# EAGLE board STM32 control board (EAGLE 9.6.1)
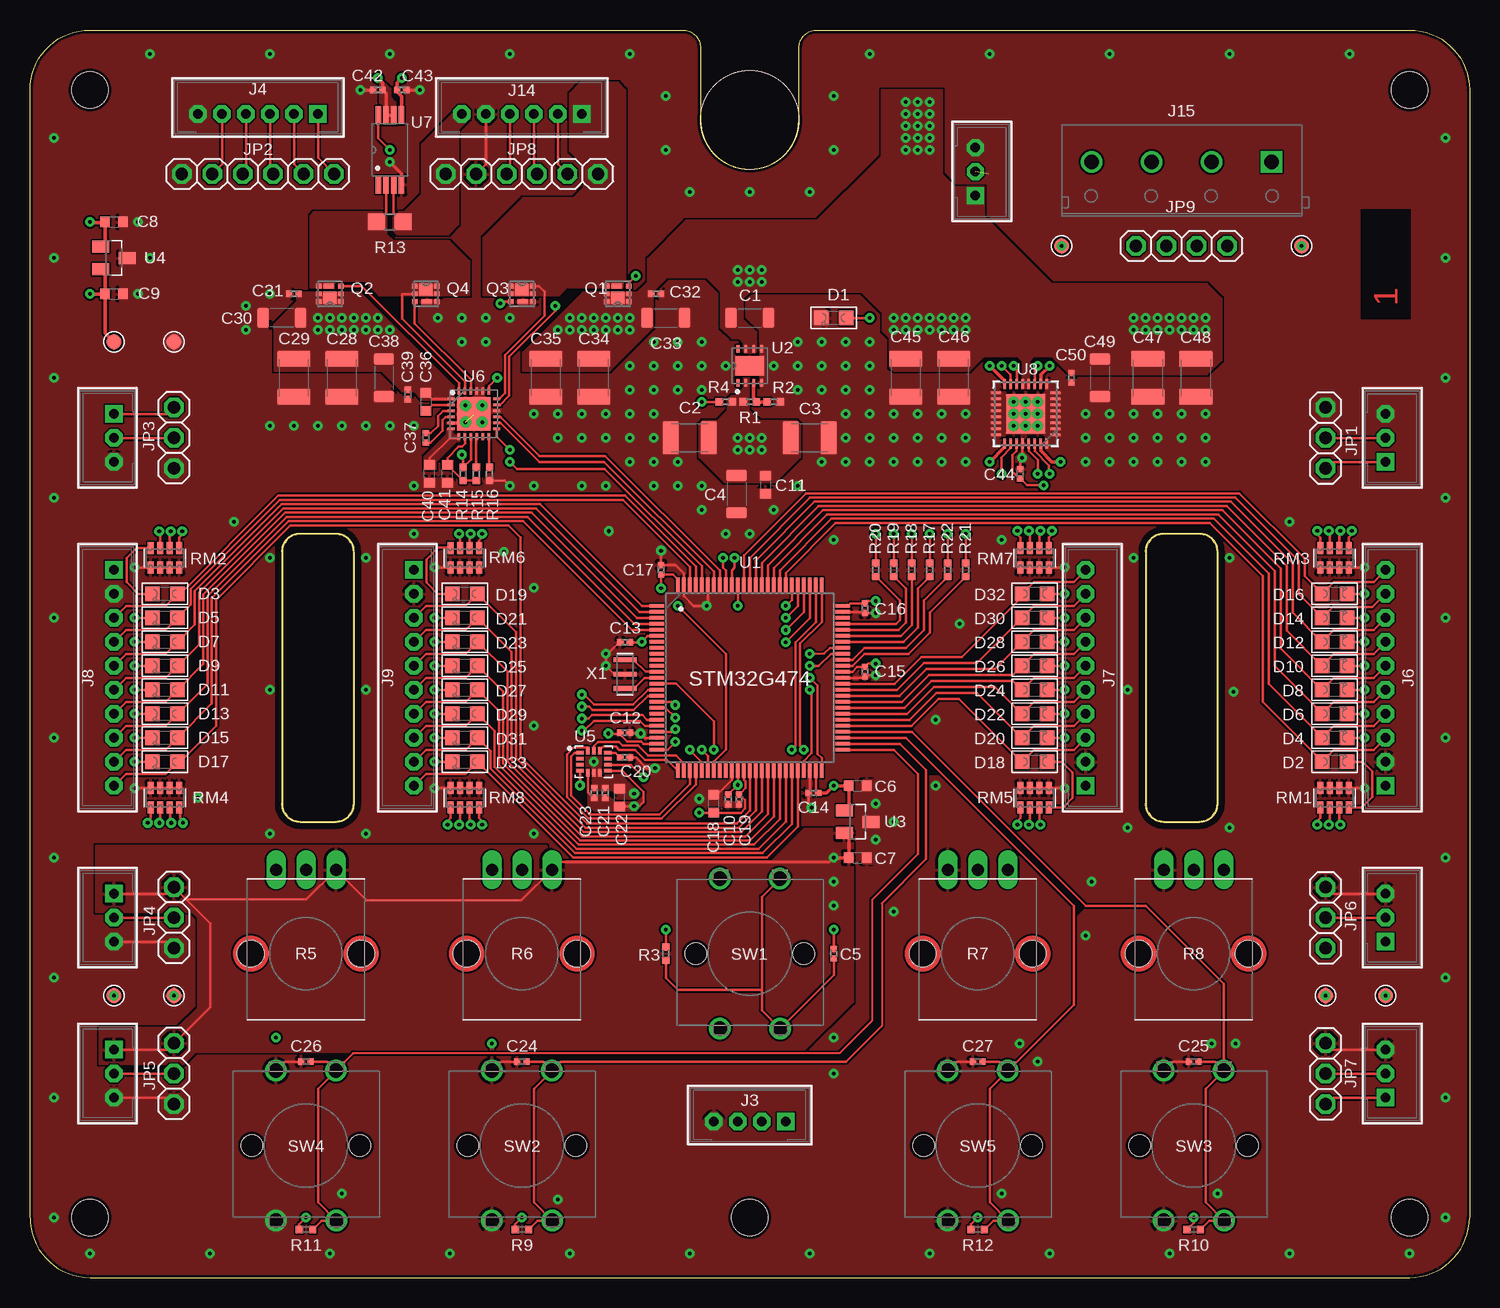
[diagram p0: board, top side]
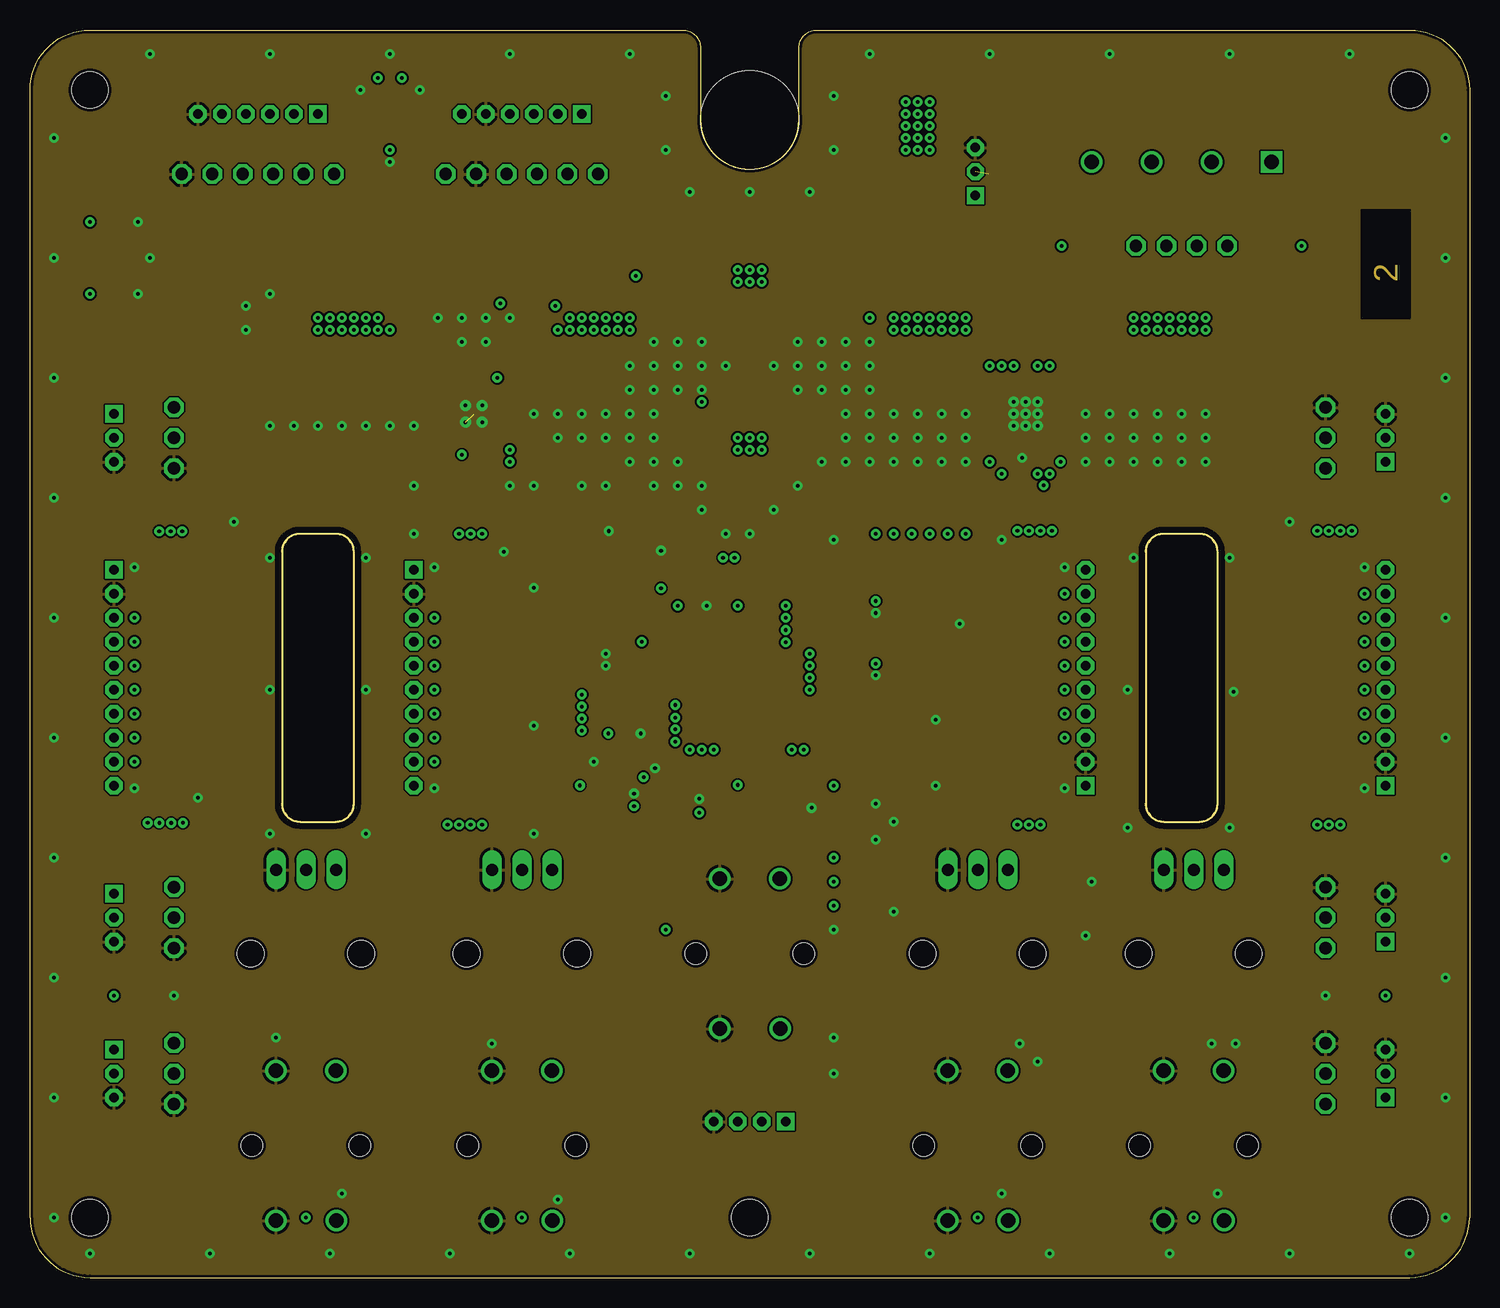
[diagram p1: board, inner layer Route2]
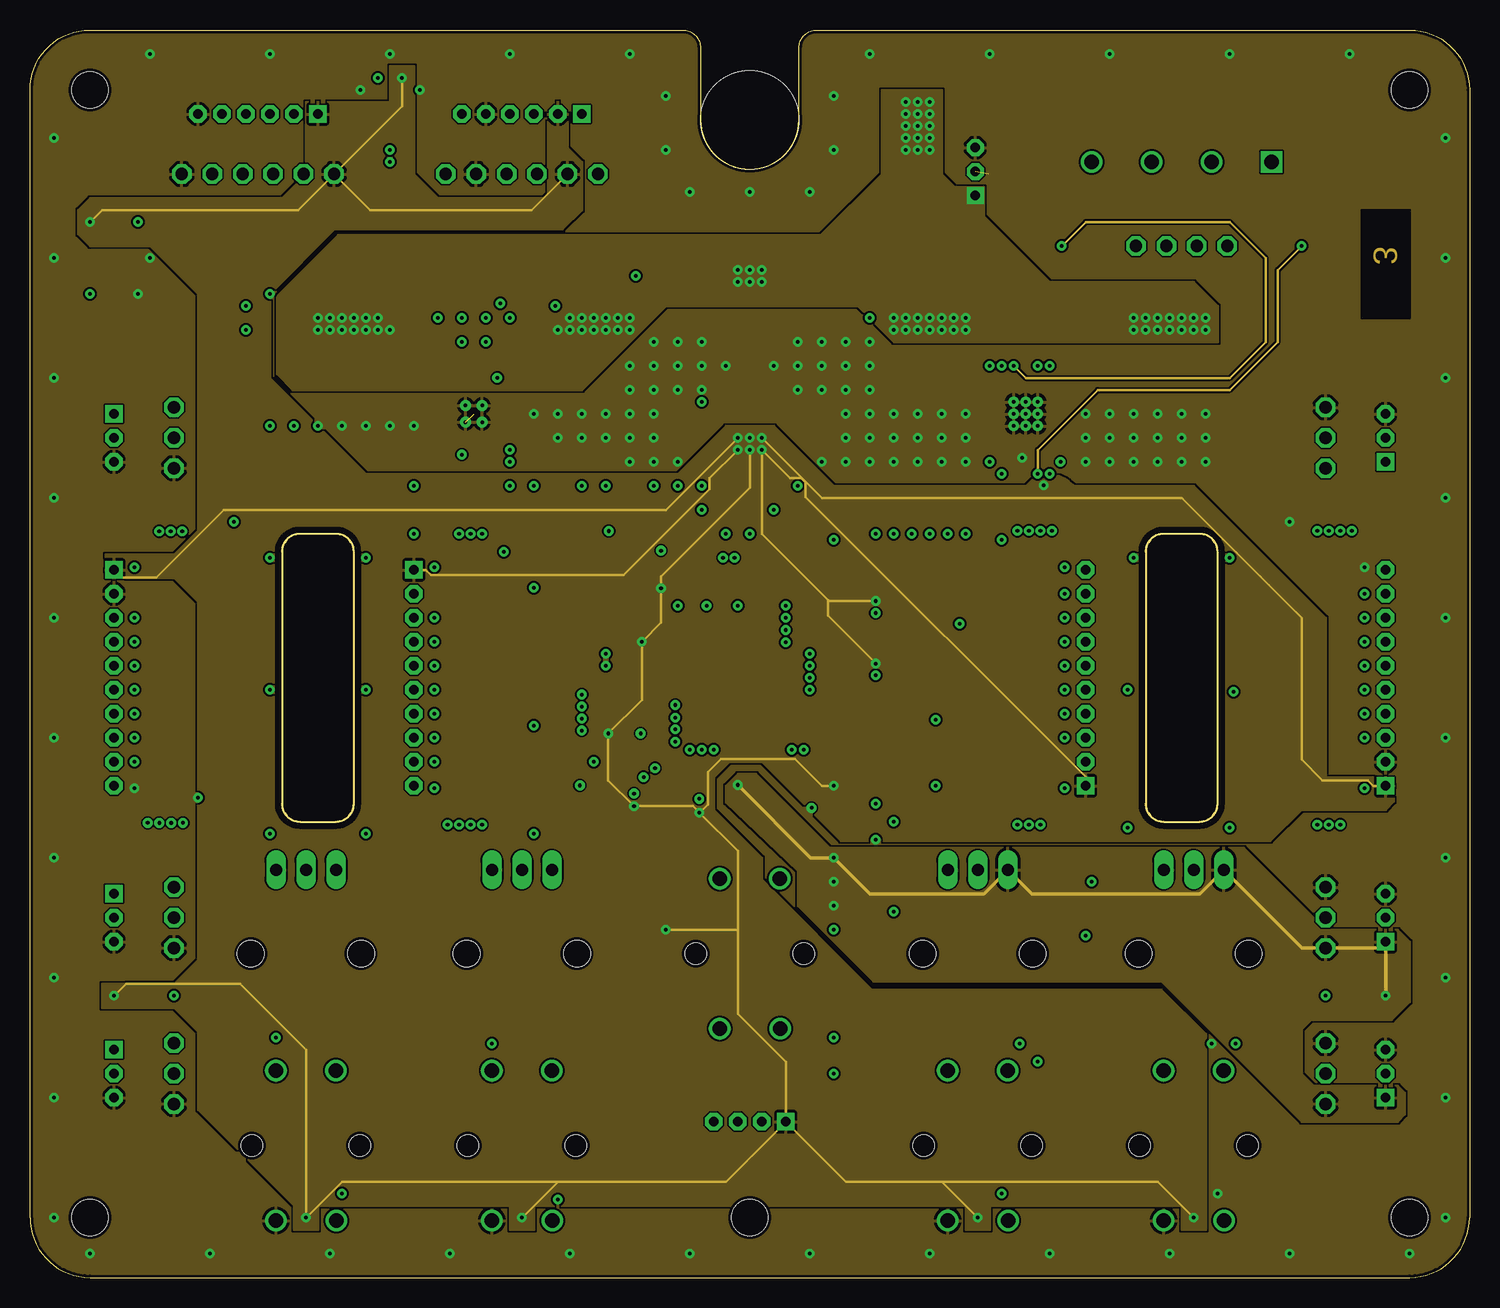
[diagram p2: board, inner layer Route15]
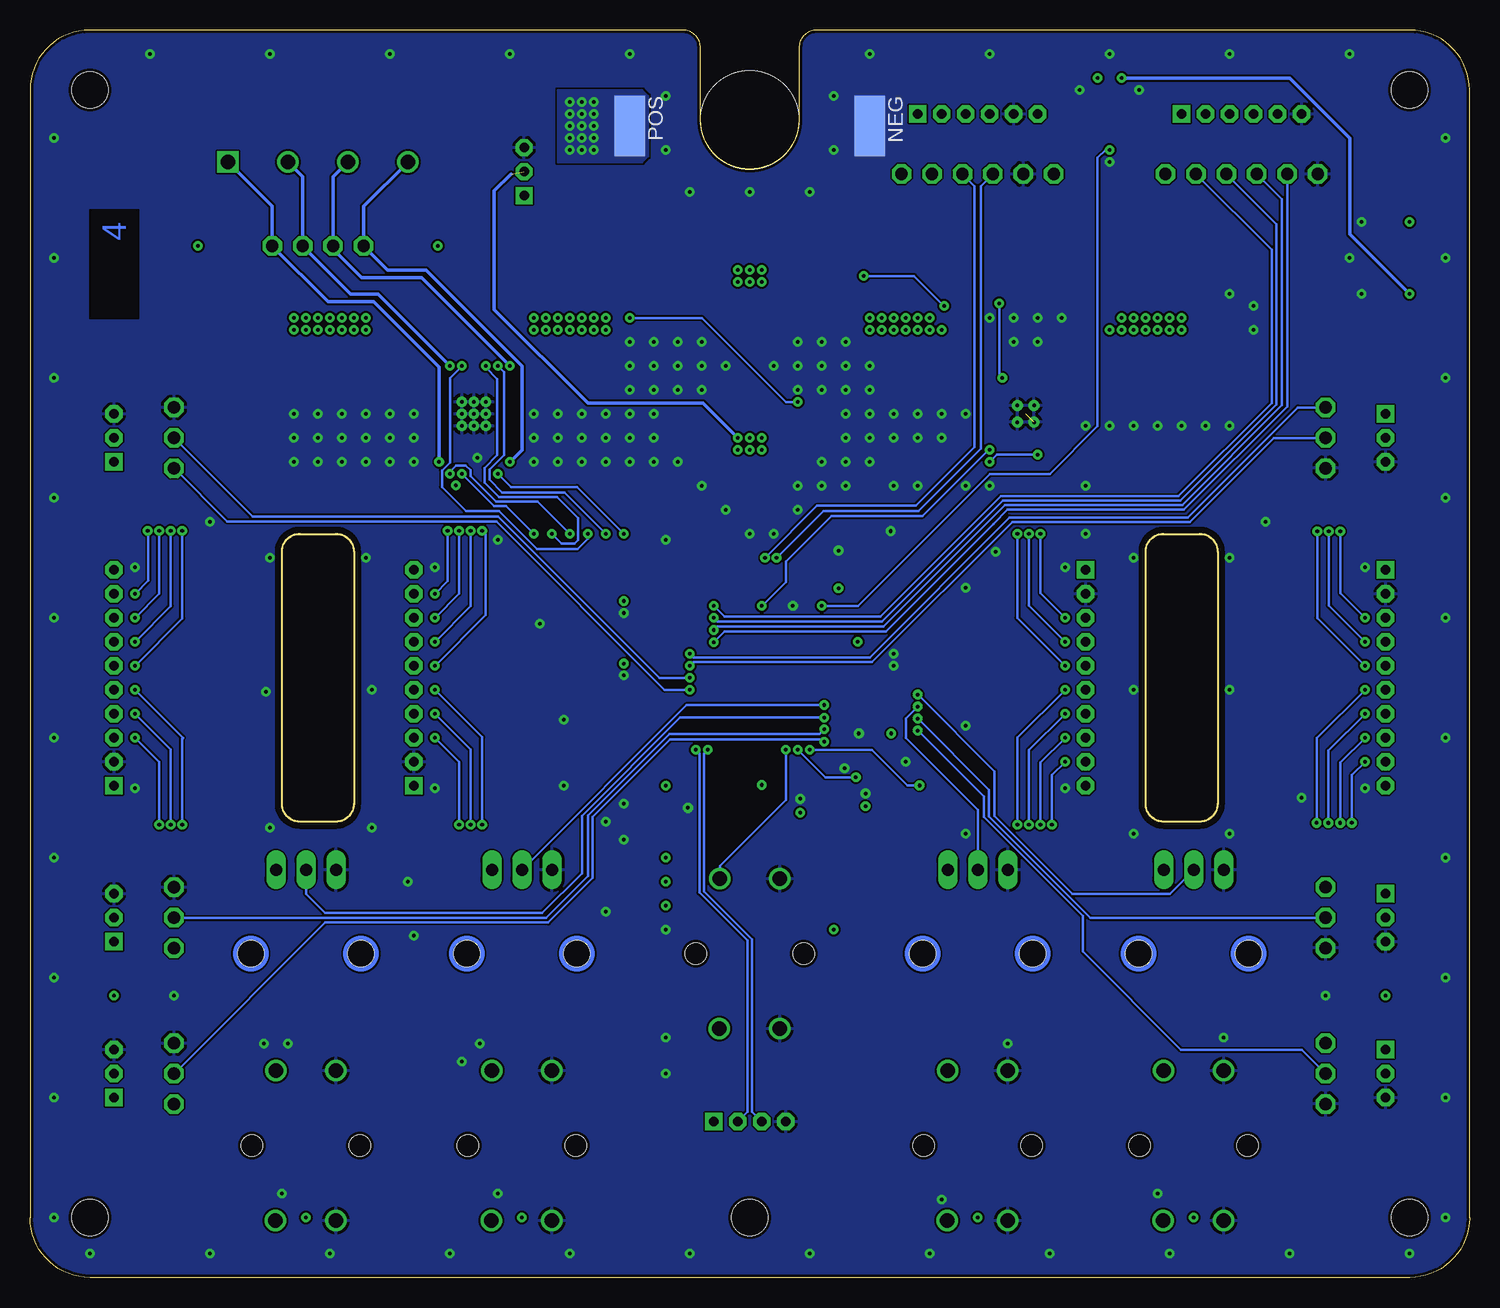
[diagram p3: board, bottom side, seen from below]

Size 120 x 104 mm. Coordinates in mm from the lower left corner, seen from the top.
Outline: 0,5 0,99 arc-90 5,104 54.4,104 arc-90 55.9,102.5 55.9,96.5 arc90 60,92.4 arc90 64.1,96.5 64.1,102.5 arc-90 65.6,104 115,104 arc-90 120,99 120,5 arc-90 115,0 5,0 arc-90 0,5
Copper layers (1+2*15+16): Top 0.035mm / dielectric 0.11mm / Route2 0.035mm / dielectric 1.13mm / Route15 0.035mm / dielectric 0.11mm / Bottom 0.035mm
Design rules "Pcb_Way_design_rules": minimum track width 6mil, minimum drill 0.3mm, track to track 6mil, track to pad 6mil, pad to pad 6mil, via to via 6mil, smd to smd 6mil, copper to edge 10mil, drill to drill 8mil, minimum pad ring 12mil, minimum via ring 10mil, stop-mask expansion 4mil, vias tented up to drill 25mil, thermal gap 10mil
Net classes: 3 POWER: clearance 0.2 mm
Holes 3 mm at 115,99 115,5 5,5 5,99 60,5
Holes 8.2 mm at 60,96.5
Milling: 16 lines

## Footprints (pad centres in the part's own frame; a part is rotated, then mirrored left to right if it is on the bottom)
TP1.27MM_MASK_SILKSCREEN = smd 1.27 x 1.27: 1 0,0
C1206 = smd 0.95 x 1.7: 1 -1.55,0; 2 1.55,0
C1210 = smd 1.35 x 2.8: 1 -1.6,0; 2 1.6,0
C0402 = smd 0.52 x 0.52: 1 -0.4,0; 2 0.4,0
C0603 = smd 0.8 x 0.9: 1 -0.75,0; 2 0.75,0
LED-0805 = smd 1.2 x 1.2: + -1.05,0; - 1.05,0
B3B-PH-K = drill 0.813 square: 1 -2,0 | drill 0.813 octagon: 2 0,0; 3 2,0
B4B-PH-K = drill 0.813 square: 1 -3,0 | drill 0.813 octagon: 2 -1,0; 3 1,0; 4 3,0
B6B-PH-K = drill 0.813 square: 1 -5,0 | drill 0.813 octagon: 2 -3,0; 3 -1,0; 4 1,0; 5 3,0; 6 5,0
B10B-PH-K = drill 0.813 square: 1 -9,0 | drill 0.813 octagon: 2 -7,0; 3 -5,0; 4 -3,0; 5 -1,0; 6 1,0; 7 3,0; 8 5,0; 9 7,0; 10 9,0
DG301-4P = drill 1.2 square: 1 -7.5,0 | drill 1.2: 2 -2.5,0; 3 2.5,0; 4 7.5,0
1X03 = drill 1.016 octagon: 1 -2.54,0; 2 0,0; 3 2.54,0
1X06 = drill 1.016 octagon: 1 -6.35,0; 2 -3.81,0; 3 -1.27,0; 4 1.27,0; 5 3.81,0; 6 6.35,0
1X04 = drill 1.016 octagon: 1 -3.81,0; 2 -1.27,0; 3 1.27,0; 4 3.81,0
SMD_PAD = smd 2.54 x 5.08: 1 0,0
SON2X2 = smd 0.455 x 0.4: D1 -0.922,0.65; D2 -0.922,0; D5 0.922,0; D6 0.922,0.65; G3 -0.922,-0.65; S4 0.922,-0.65 | smd 1.1 x 1.05: D7 0,0.325 | smd 0.85 x 0.4: S8 0.09,-0.65
R0402 = smd 0.6 x 0.6: 1 -0.55,0; 2 0.55,0
ALPS_PTM_LONG = drill 1 long: P$1 -2.5,0; P$2 0,0; P$3 2.5,0 | hole 2.2: -4.6,7; 4.6,7
CS_R0805 = smd 1.4 x 1.4: 1 -1.1,0; 2 1.1,0
0603-ARC = smd 0.5 x 1: 1 -1.2,-0.802; 2 -0.4,-0.802; 3 0.4,-0.802; 4 1.2,-0.802; 5 1.2,0.802; 6 0.4,0.802; 7 -0.4,0.802; 8 -1.2,0.802
SWITCH_B3F-4055 = drill 1.2 pad 1.753: 1 6.25,-2.5; 2 -6.25,-2.54; 3 6.25,2.5; 4 -6.25,2.5 | hole 1.8: 0,4.5; 0,-4.5
LPQFP-100 = smd 1.194 x 0.305: 1 -7.75,6; 2 -7.75,5.5; 3 -7.75,5; 4 -7.75,4.5; 5 -7.75,4; 6 -7.75,3.5; 7 -7.75,3; 8 -7.75,2.5; 9 -7.75,2; 10 -7.75,1.5; 11 -7.75,1; 12 -7.75,0.5; 13 -7.75,0; 14 -7.75,-0.5; 15 -7.75,-1; 16 -7.75,-1.5; 17 -7.75,-2; 18 -7.75,-2.5; 19 -7.75,-3; 20 -7.75,-3.5; 21 -7.75,-4; 22 -7.75,-4.5; 23 -7.75,-5; 24 -7.75,-5.5; 25 -7.75,-6; 51 7.75,-6; 52 7.75,-5.5; 53 7.75,-5; 54 7.75,-4.5; 55 7.75,-4; 56 7.75,-3.5; 57 7.75,-3; 58 7.75,-2.5; 59 7.75,-2; 60 7.75,-1.5; 61 7.75,-1; 62 7.75,-0.5; 63 7.75,0; 64 7.75,0.5; 65 7.75,1; 66 7.75,1.5; 67 7.75,2; 68 7.75,2.5; 69 7.75,3; 70 7.75,3.5; 71 7.75,4; 72 7.75,4.5; 73 7.75,5; 74 7.75,5.5; 75 7.75,6 | smd 0.305 x 1.194: 26 -6,-7.75; 27 -5.5,-7.75; 28 -5,-7.75; 29 -4.5,-7.75; 30 -4,-7.75; 31 -3.5,-7.75; 32 -3,-7.75; 33 -2.5,-7.75; 34 -2,-7.75; 35 -1.5,-7.75; 36 -1,-7.75; 37 -0.5,-7.75; 38 0,-7.75; 39 0.5,-7.75; 40 1,-7.75; 41 1.5,-7.75; 42 2,-7.75; 43 2.5,-7.75; 44 3,-7.75; 45 3.5,-7.75; 46 4,-7.75; 47 4.5,-7.75; 48 5,-7.75; 49 5.5,-7.75; 50 6,-7.75; 76 6,7.75; 77 5.5,7.75; 78 5,7.75; 79 4.5,7.75; 80 4,7.75; 81 3.5,7.75; 82 3,7.75; 83 2.5,7.75; 84 2,7.75; 85 1.5,7.75; 86 1,7.75; 87 0.5,7.75; 88 0,7.75; 89 -0.5,7.75; 90 -1,7.75; 91 -1.5,7.75; 92 -2,7.75; 93 -2.5,7.75; 94 -3,7.75; 95 -3.5,7.75; 96 -4,7.75; 97 -4.5,7.75; 98 -5,7.75; 99 -5.5,7.75; 100 -6,7.75
DRB0008B = smd 0.61 x 0.305: 1 -1.4,0.975; 2 -1.4,0.325; 3 -1.4,-0.325; 4 -1.4,-0.975; 5 1.4,-0.975; 6 1.4,-0.325; 7 1.4,0.325; 8 1.4,0.975 | smd 1.651 x 2.388: 9 0,0
SOT-23-3 = smd 1 x 1.4: 1 0,1.1; 2 0.95,-1.1; 3 -0.95,-1.1
14_PIN_LGA = smd 0.61 x 0.3: 1 -1.16,0.75; 2 -1.16,0.25; 3 -1.16,-0.25; 4 -1.16,-0.75; 8 1.16,-0.75; 9 1.16,-0.25; 10 1.16,0.25; 11 1.16,0.75 | smd 0.3 x 0.61: 5 -0.5,-0.91; 6 0,-0.91; 7 0.5,-0.91; 12 0.5,0.91; 13 0,0.91; 14 -0.5,0.91
VQFN-24-VIA = smd 0.61 x 0.229: 1 -1.9,1.25; 2 -1.9,0.75; 3 -1.9,0.25; 4 -1.9,-0.25; 5 -1.9,-0.75; 6 -1.9,-1.25; 13 1.9,-1.25; 14 1.9,-0.75; 15 1.9,-0.25; 16 1.9,0.25; 17 1.9,0.75; 18 1.9,1.25 | smd 0.229 x 0.61: 7 -1.25,-1.9; 8 -0.75,-1.9; 9 -0.25,-1.9; 10 0.25,-1.9; 11 0.75,-1.9; 12 1.25,-1.9; 19 1.25,1.9; 20 0.75,1.9; 21 0.25,1.9; 22 -0.25,1.9; 23 -0.75,1.9; 24 -1.25,1.9 | smd 2.794 x 2.794: 25 0,0 | drill 0.3: 26 -0.7,0.7; 27 -0.7,-0.7; 28 0.7,-0.7; 29 0.7,0.7
TSSOP-8 = smd 1.499 x 0.457: 1 -2.9,0.975; 2 -2.9,0.325; 3 -2.9,-0.325; 4 -2.9,-0.975; 5 2.9,-0.975; 6 2.9,-0.325; 7 2.9,0.325; 8 2.9,0.975
QFN_293Q_STM = smd 0.808 x 0.225: 1 -2.474,1.75; 2 -2.474,1.25; 3 -2.474,0.75; 4 -2.474,0.25; 5 -2.474,-0.25; 6 -2.474,-0.75; 7 -2.474,-1.25; 8 -2.474,-1.75; 17 2.474,-1.75; 18 2.474,-1.25; 19 2.474,-0.75; 20 2.474,-0.25; 21 2.474,0.25; 22 2.474,0.75; 23 2.474,1.25; 24 2.474,1.75 | smd 0.225 x 0.808: 9 -1.75,-2.474; 10 -1.25,-2.474; 11 -0.75,-2.474; 12 -0.25,-2.474; 13 0.25,-2.474; 14 0.75,-2.474; 15 1.25,-2.474; 16 1.75,-2.474; 25 1.75,2.474; 26 1.25,2.474; 27 0.75,2.474; 28 0.25,2.474; 29 -0.25,2.474; 30 -0.75,2.474; 31 -1.25,2.474; 32 -1.75,2.474 | drill 0.3: P$1 -1,1; P$2 0,1; P$3 1,1; P$4 -1,0; P$5 0,0; P$6 1,0; P$7 -1,-1; P$8 0,-1; P$9 1,-1 | smd 3.3 x 3.3: PAD 0,0
MURATA_SMD_3P = smd 0.4 x 1.9: 1 -1.2,0; 2 0,0; 3 1.2,0

## Placement (x,y rotation side)
$1_148_$_2020-08-01_13-42-32  [TP1.27MM_MASK_SILKSCREEN]  108,23.5 0 top
C1  10uF  [C1206]  60,80 0 top
C2  22uF  [C1210]  55,70 180 top
C3  22uF  [C1210]  65,70 0 top
C4  10uF  [C1206]  58.9,65.3 270 top
C5  100nF  [C0402]  67,27 90 top
C6  4.7uF  [C0603]  69,41 0 top
C7  4.7uF  [C0603]  69,35 0 top
C8  4.7uF  [C0603]  7,88 0 top
C9  4.7uF  [C0603]  7,82 0 top
C10  100nF  [C0402]  58.2,39.85 270 top
C11  4.7uF  [C0603]  61.3,66.1 270 top
C12  100nF  [C0402]  49.6,45.42 0 top
C13  100nF  [C0402]  49.6,52.95 180 top
C14  100nF  [C0402]  65.3,40.4 180 top
C15  100nF  [C0402]  69.6,50.5 270 top
C16  100nF  [C0402]  69.6,55.8 270 top
C17  100nF  [C0402]  52.6,59 90 top
C18  1uF  [C0603]  57,39.5 90 top
C19  100nF  [C0402]  59.1,39.85 270 top
C20  100nF  [C0402]  49.6,43.36 0 top
C21  100nF  [C0402]  47.95,40.41 90 top
C22  4.7uF  [C0603]  49.15,40.01 90 top
C23  10nF  [C0402]  47.05,40.41 90 top
C24  100nF  [C0402]  41,18 180 top
C25  100nF  [C0402]  97,18 180 top
C26  100nF  [C0402]  23,18 180 top
C27  100nF  [C0402]  79,18 180 top
C28  22uF  [C1210]  26,75 270 top
C29  22uF  [C1210]  22,75 270 top
C30  10uF  [C1206]  21,80 180 top
C31  100nF  [C0402]  22,82 180 top
C32  100nF  [C0402]  52.2,82 0 top
C33  10uF  [C1206]  53,80 0 top
C34  22uF  [C1210]  47,75 270 top
C35  22uF  [C1210]  43,75 270 top
C36  1uF  [C0603]  33,73 270 top
C37  100nF  [C0402]  33,70 270 top
C38  10uF  [C1206]  29.5,75 270 top
C39  100nF  [C0402]  31.5,73.6 270 top
C40  1uF  [C0603]  33.3,67 90 top
C41  1uF  [C0603]  34.8,67 90 top
C42  100nF  [C0402]  29,99 180 top
C43  100nF  [C0402]  31,99 0 top
C44  100nF  [C0402]  82.55,67 90 top
C45  22uF  [C1210]  73,75 270 top
C46  22uF  [C1210]  77,75 270 top
C47  22uF  [C1210]  93.19,75 270 top
C48  22uF  [C1210]  97.19,75 270 top
C49  10uF  [C1206]  89.19,75 270 top
C50  100nF  [C0402]  86.81,75 270 top
D1  Green  [LED-0805]  67,80 180 top
D2  Blue  [LED-0805]  108.75,43 0 top
D3  Blue  [LED-0805]  11.25,57 180 top
D4  Blue  [LED-0805]  108.75,45 0 top
D5  Blue  [LED-0805]  11.25,55 180 top
D6  Blue  [LED-0805]  108.75,47 0 top
D7  Blue  [LED-0805]  11.25,53 180 top
D8  Blue  [LED-0805]  108.75,49 0 top
D9  Blue  [LED-0805]  11.25,51 180 top
D10  Blue  [LED-0805]  108.75,51 0 top
D11  Blue  [LED-0805]  11.25,49 180 top
D12  Blue  [LED-0805]  108.75,53 0 top
D13  Blue  [LED-0805]  11.25,47 180 top
D14  Blue  [LED-0805]  108.75,55 0 top
D15  Blue  [LED-0805]  11.25,45 180 top
D16  Blue  [LED-0805]  108.75,57 0 top
D17  Blue  [LED-0805]  11.25,43 180 top
D18  Blue  [LED-0805]  83.75,43 0 top
D19  Blue  [LED-0805]  36.25,57 180 top
D20  Blue  [LED-0805]  83.75,45 0 top
D21  Blue  [LED-0805]  36.25,55 180 top
D22  Blue  [LED-0805]  83.75,47 0 top
D23  Blue  [LED-0805]  36.25,53 180 top
D24  Blue  [LED-0805]  83.75,49 0 top
D25  Blue  [LED-0805]  36.25,51 180 top
D26  Blue  [LED-0805]  83.75,51 0 top
D27  Blue  [LED-0805]  36.25,49 180 top
D28  Blue  [LED-0805]  83.75,53 0 top
D29  Blue  [LED-0805]  36.25,47 180 top
D30  Blue  [LED-0805]  83.75,55 0 top
D31  Blue  [LED-0805]  36.25,45 180 top
D32  Blue  [LED-0805]  83.75,57 0 top
D33  Blue  [LED-0805]  36.25,43 180 top
J1  B3B-PH  [B3B-PH-K]  78.8,92.2 90 top
J2  B3B-PH  [B3B-PH-K]  113,70 90 top
J3  B4B-PH  [B4B-PH-K]  60,13 180 top
J4  B6B-PH  [B6B-PH-K]  19,97 180 top
J5  B3B-PH  [B3B-PH-K]  7,70 270 top
J6  B10B-PH  [B10B-PH-K]  113,50 90 top
J7  B10B-PH  [B10B-PH-K]  88,50 90 top
J8  B10B-PH  [B10B-PH-K]  7,50 270 top
J9  B10B-PH  [B10B-PH-K]  32,50 270 top
J10  B3B-PH  [B3B-PH-K]  7,30 270 top
J11  B3B-PH  [B3B-PH-K]  7,17 270 top
J12  B3B-PH  [B3B-PH-K]  113,30 90 top
J13  B3B-PH  [B3B-PH-K]  113,17 90 top
J14  B6B-PH  [B6B-PH-K]  41,97 180 top
J15  DG301-4P  [DG301-4P]  96,93 180 top
JP1  [1X03]  108,70 90 top
JP2  [1X06]  19,92 180 top
JP3  [1X03]  12,70 270 top
JP4  [1X03]  12,30 270 top
JP5  [1X03]  12,17 270 top
JP6  [1X03]  108,30 90 top
JP7  [1X03]  108,17 90 top
JP8  [1X06]  41,92 180 top
JP9  [1X04]  96,86 180 top
NEG  [SMD_PAD]  50,96 180 bottom
POS  [SMD_PAD]  70,96 180 bottom
Q1  [SON2X2]  49,82 180 top
Q2  [SON2X2]  25,82 180 top
Q3  [SON2X2]  41,82 0 top
Q4  [SON2X2]  33,82 0 top
R1  16k9  [R0402]  60,73 180 top
R2  10k  [R0402]  62,73 180 top
R3  10k  [R0402]  53,27 270 top
R4  10k  [R0402]  58,73 0 top
R5  10K  [ALPS_PTM_LONG]  23,34 180 top
R6  10K  [ALPS_PTM_LONG]  41,34 180 top
R7  10K  [ALPS_PTM_LONG]  79,34 180 top
R8  10K  [ALPS_PTM_LONG]  97,34 180 top
R9  10k  [R0402]  41,4 180 top
R10  10k  [R0402]  97,4 180 top
R11  10k  [R0402]  23,4 180 top
R12  10k  [R0402]  79,4 180 top
R13  10 mOhm  [CS_R0805]  30,88 0 top
R14  10k  [R0402]  36.1,67 270 top
R15  10k  [R0402]  37.2,67 270 top
R16  510k  [R0402]  38.3,67 90 top
R17  100  [R0402]  75,59 90 top
R18  100  [R0402]  73.5,59 90 top
R19  100  [R0402]  72,59 90 top
R20  100  [R0402]  70.5,59 90 top
R21  100  [R0402]  78,59 90 top
R22  100  [R0402]  76.5,59 90 top
RM1  RES_ARRAY0603  [0603-ARC]  108.75,40 180 top
RM2  RES_ARRAY0603  [0603-ARC]  11.25,60 0 top
RM3  RES_ARRAY0603  [0603-ARC]  108.75,60 0 top
RM4  RES_ARRAY0603  [0603-ARC]  11.25,40 180 top
RM5  RES_ARRAY0603  [0603-ARC]  83.75,40 180 top
RM6  RES_ARRAY0603  [0603-ARC]  36.25,60 0 top
RM7  RES_ARRAY0603  [0603-ARC]  83.75,60 0 top
RM8  RES_ARRAY0603  [0603-ARC]  36.25,40 180 top
SW1  B3F-4055  [SWITCH_B3F-4055]  60,27 90 top
SW2  B3F-4055  [SWITCH_B3F-4055]  41,11 90 top
SW3  B3F-4055  [SWITCH_B3F-4055]  97,11 90 top
SW4  B3F-4055  [SWITCH_B3F-4055]  23,11 90 top
SW5  B3F-4055  [SWITCH_B3F-4055]  79,11 90 top
TP1  1.8  [TP1.27MM_MASK_SILKSCREEN]  12,23.5 0 top
TP2  1.8  [TP1.27MM_MASK_SILKSCREEN]  7,23.5 0 top
TP3  1.8  [TP1.27MM_MASK_SILKSCREEN]  12,78 0 top
TP4  3.0  [TP1.27MM_MASK_SILKSCREEN]  113,23.5 0 top
TP5  1.8  [TP1.27MM_MASK_SILKSCREEN]  7,78 180 top
TP37  [TP1.27MM_MASK_SILKSCREEN]  106,86 0 top
TP38  [TP1.27MM_MASK_SILKSCREEN]  86,86 0 top
U1  STM32G474  [LPQFP-100]  60,50 0 top
U2  TPS7A19  [DRB0008B]  60,76 90 top
U3  REF3330  [SOT-23-3]  69,38 270 top
U4  REF3318  [SOT-23-3]  7,85 270 top
U5  ICM_20600  [14_PIN_LGA]  47,43 0 top
U6  DRV8701VIA  [VQFN-24-VIA]  37,72 0 top
U7  [TSSOP-8]  30,94 90 top
U8  L2293Q  [QFN_293Q_STM]  83,72 180 top
X1  CSTNE  [MURATA_SMD_3P]  49.6,50.3 90 top

## Library data of the parts
$1_148_$_2020-08-01_13-42-32 NEG POS TP1-TP5 TP37 TP38 = testing
C1 C4 C30 C33 C38 C49 = Capacitors; MANUFACTURER_PART_NUMBER: CL31B106KAHNNNE
C2 C3 C28 C29 C34 C35 C45-C48 = Capacitors; MANUFACTURER_PART_NUMBER: GRM32ER61C476ME15L
C5-C27 C31 C32 C36 C37 C39-C44 C50 = Capacitors
D1-D33 = Semiconductor_devices
J1-J14 = con-jst-ph
J15 = Terminal blocks
JP1-JP9 = commonly used connectors
Q1-Q4 = Transistors; MANUFACTURER_PART_NUMBER: CSD15571Q2
R1-R12 R14-R22 RM1-RM8 = Resistors
R13 = Resistors; MANUFACTURER_PART_NUMBER: ERJ6CWDR010V
SW1-SW5 = buttons and switches; BUILT_BY: EMA_Cory; COPYRIGHT: Copyright (C) 2018 Accelerated Designs. All rights reserved; MANUFACTURER_PART_NUMBER: B3F-4055; VENDOR: Omron
U1 = stmicroelectronics; BUILT_BY: EMA_Jessica; COPYRIGHT: Copyright (C) 2016 Accelerated Designs. All rights reserved; MANUFACTURER_PART_NUMBER: STM32G4_LPQFP100_T1; VENDOR: STMicroelectronics
U2 = LDOs; DATASHEET: https://www.ti.com/lit/ds/symlink/tps7a19.pdf?ts=1594646251403&ref_url=https%253A%252F%252Fwww.google.com%252F; MANUFACTURER_PART_NUMBER: TPS7A1901DRBT
U3 U4 = Voltage references
U5 = InvenSence
U6 = Transistors drivers
U7 = Current sensing; MANUFACTURER_PART_NUMBER: INA240
U8 = Transistors drivers; MANUFACTURER_PART_NUMBER: L2293Q
X1 = resonators and oscillators

## Nets
+1.8V: C9.1 C42.1 TP5.1 U4.2 U7.6 U7.7
+3V: C7.1 C10.1 J10.1 J11.1 J12.1 J13.1 JP4.1 JP5.1 JP6.1 JP7.1 R5.P$1 R6.P$1 R7.P$1 R8.P$1 TP4.1 U1.36 U3.2
+3V3: C2.1 C3.1 C4.1 C6.1 C8.1 C11.1 C12.1 C13.1 C14.1 C15.1 C16.1 C17.1 C18.1 C19.1 C21.1 C22.1 C23.1 C43.1 C44.1 J1.2 J3.1 J4.1 J6.1 J7.1 J8.1 J9.1 J14.2 JP2.1 JP8.2 R1.2 R3.1 R4.2 R9.2 R10.2 R11.2 R12.2 TP2.1 U1.6 U1.24 U1.37 U1.49 U1.64 U1.75 U1.100 U2.2 U3.3 U4.3 U5.5 U5.8 U7.5 U8.27
AVDD1: C40.2 U6.6 U6.7
BRIDGE1_EN: R21.1 U1.65
BRIDGE2_EN: R22.1 U1.66
DRV2_SNSOUT: R15.1 U6.10
DVDD2: C41.2 R14.2 R15.2 U6.8
ENCODER_1: J14.3 JP8.3 U1.91
ENCODER_2: J14.4 JP8.4 U1.92
GND: $1_148_$_2020-08-01_13-42-32.1 C1.2 C2.2 C3.2 C4.2 C5.2 C6.2 C7.2 C8.2 C9.2 C10.2 C11.2 C12.2 C13.2 C14.2 C15.2 C16.2 C17.2 C18.2 C19.2 C20.2 C21.2 C22.2 C23.2 C24.2 C25.2 C26.2 C27.2 C28.2 C29.2 C30.2 C31.2 C32.2 C33.2 C34.2 C35.2 C38.2 C39.2 C40.1 C41.1 C42.2 C43.2 C44.2 C45.2 C46.2 C47.2 C48.2 C49.2 C50.2 D1.- J1.3 J2.3 J3.4 J4.6 J5.3 J6.2 J7.2 J8.2 J9.2 J10.3 J11.3 J12.3 J13.3 J14.5 JP1.3 JP2.6 JP3.3 JP4.3 JP5.3 JP6.3 JP7.3 JP8.5 NEG.1 Q3.S4 Q3.S8 Q4.S4 Q4.S8 R2.1 R5.P$3 R6.P$3 R7.P$3 R8.P$3 R16.1 RM1.1 RM1.2 RM1.3 RM1.4 RM2.1 RM2.2 RM2.3 RM2.4 RM3.1 RM3.2 RM3.3 RM3.4 RM4.1 RM4.2 RM4.3 RM4.4 RM5.1 RM5.2 RM5.3 RM5.4 RM6.1 RM6.2 RM6.3 RM6.4 RM7.1 RM7.2 RM7.3 RM7.4 RM8.1 RM8.2 RM8.3 RM8.4 SW1.3 SW1.4 SW2.3 SW2.4 SW3.3 SW3.4 SW4.3 SW4.4 SW5.3 SW5.4 TP1.1 TP3.1 U1.23 U1.35 U1.48 U1.63 U1.74 U1.95 U1.99 U2.4 U2.5 U2.9 U3.1 U4.1 U5.6 U5.7 U6.5 U6.16 U6.20 U6.21 U6.25 U6.26 U6.27 U6.28 U6.29 U7.4 U8.1 U8.2 U8.3 U8.4 U8.5 U8.6 U8.7 U8.8 U8.9 U8.17 U8.18 U8.19 U8.20 U8.21 U8.22 U8.23 U8.24 U8.28 U8.32 U8.P$1 U8.P$2 U8.P$3 U8.P$4 U8.P$5 U8.P$6 U8.P$7 U8.P$8 U8.P$9 U8.PAD X1.2
I2C3_SCL: J5.2 JP3.2 U1.67
I2C3_SDA: J5.1 JP3.1 U1.68
ICM_CS [ICM20600]: U1.26 U5.12
ICM_INT1 [ICM20600]: U1.30 U5.4
ICM_INT2 [ICM20600]: U1.31 U5.9
ICM_MISO [ICM20600]: U1.28 U5.1
ICM_MOSI [ICM20600]: U1.29 U5.14
ICM_SCK [ICM20600]: U1.27 U5.13
M2: J14.6 JP8.6 R13.2 U7.3
M_GH1: Q1.G3 U6.17
M_GH2: Q2.G3 U6.24
M_GL1: Q3.G3 U6.19
M_GL2: Q4.G3 U6.22
M_IN1: U1.93 U6.15
M_IN2: U1.94 U6.14
M_NFAULT: R14.1 U1.96 U6.9
M_NSLEEP: U1.90 U6.13
M_SH1: J14.1 JP8.1 Q1.S4 Q1.S8 Q3.D1 Q3.D2 Q3.D5 Q3.D6 Q3.D7 U6.18
M_SH2: Q2.S4 Q2.S8 Q4.D1 Q4.D2 Q4.D5 Q4.D6 Q4.D7 R13.1 U6.23 U7.2
MOTOR_CS: U1.32 U7.8
N$1: U1.12 X1.3
N$2: U1.13 X1.1
N$3: D16.- RM3.5
N$4: D14.- RM3.6
N$5: D12.- RM3.7
N$6: D10.- RM3.8
N$7: D1.+ R4.1
N$8: R17.2 U8.30
N$9: D2.- RM1.8
N$10: D4.- RM1.7
N$11: D6.- RM1.6
N$12: D8.- RM1.5
N$15: R18.2 U8.11
N$16: R19.2 U8.15
N$18: R20.2 U8.26
N$19: R21.2 TP37.1 U8.29
N$20: R22.2 TP38.1 U8.14
N$21: R1.1 R2.2 U2.3
N$23: D18.- RM5.8
N$24: C37.1 U6.3
N$25: D20.- RM5.7
N$26: D22.- RM5.6
N$27: D24.- RM5.5
N$28: D26.- RM7.8
N$29: D28.- RM7.7
N$30: D30.- RM7.6
N$31: D32.- RM7.5
N$32: C37.2 U6.4
N$33: C36.2 U6.2
N$34: D3.- RM2.8
N$35: D5.- RM2.7
N$36: D7.- RM2.6
N$37: R16.2 U6.12
N$38: D9.- RM2.5
N$39: D11.- RM4.8
N$40: D13.- RM4.7
N$41: D15.- RM4.6
N$42: D17.- RM4.5
N$43: D19.- RM6.8
N$44: D21.- RM6.7
N$45: D23.- RM6.6
N$46: D25.- RM6.5
N$47: D27.- RM8.8
N$48: D29.- RM8.7
N$49: D31.- RM8.6
N$50: D33.- RM8.5
PA0: J10.2 JP4.2 U1.20
PA1: J11.2 JP5.2 U1.21
PA2: J12.2 JP6.2 U1.22
PA3: J13.2 JP7.2 U1.25
PB12: C26.1 R11.1 SW4.1 SW4.2 U1.51
PB13: C24.1 R9.1 SW2.1 SW2.2 U1.52
PB14: C27.1 R12.1 SW5.1 SW5.2 U1.53
PB15: C25.1 R10.1 SW3.1 SW3.2 U1.54
PC0: R5.P$2 U1.15
PC1: R6.P$2 U1.16
PC2: R7.P$2 U1.17
PC3: R8.P$2 U1.18
PD0: D2.+ J6.3 U1.82
PD1: D4.+ J6.4 U1.83
PD2: D6.+ J6.5 U1.84
PD3: D8.+ J6.6 U1.85
PD4: D10.+ J6.7 U1.86
PD5: D12.+ J6.8 U1.87
PD6: D14.+ J6.9 U1.88
PD7: D16.+ J6.10 U1.89
PD8: D18.+ J7.3 U1.55
PD9: D20.+ J7.4 U1.56
PD10: D22.+ J7.5 U1.57
PD11: D24.+ J7.6 U1.58
PD12: D26.+ J7.7 U1.59
PD13: D28.+ J7.8 U1.60
PD14: D30.+ J7.9 U1.61
PD15: D32.+ J7.10 U1.62
PE0: D3.+ J8.3 U1.97
PE1: D5.+ J8.4 U1.98
PE2: D7.+ J8.5 U1.1
PE3: D9.+ J8.6 U1.2
PE4: D11.+ J8.7 U1.3
PE5: D13.+ J8.8 U1.4
PE6: D15.+ J8.9 U1.5
PE7: D17.+ J8.10 U1.38
PE8: D19.+ J9.3 U1.39
PE9: D21.+ J9.4 U1.40
PE10: D23.+ J9.5 U1.41
PE11: D25.+ J9.6 U1.42
PE12: D27.+ J9.7 U1.43
PE13: D29.+ J9.8 U1.44
PE14: D31.+ J9.9 U1.45
PE15: D33.+ J9.10 U1.46
PO1: J15.1 JP9.1 U8.31
PO2: J15.2 JP9.2 U8.10
PO3: J15.3 JP9.3 U8.16
PO4: J15.4 JP9.4 U8.25
POWER_OUT1: R17.1 U1.69
POWER_OUT2: R18.1 U1.70
POWER_OUT3: R19.1 U1.71
POWER_OUT4: R20.1 U1.72
REG: C20.1 U5.11
RST: C5.1 R3.2 SW1.1 SW1.2 U1.14
SPI3_MISO: J4.3 JP2.3 U1.80
SPI3_MOSI: J4.2 JP2.2 U1.81
SPI3_SCK: J4.4 JP2.4 U1.79
SPI_CS: J4.5 JP2.5 U1.78
SWCLK: J3.3 U1.77
SWDIO: J3.2 U1.76
USART3_RX: J2.2 JP1.2 U1.50
USART3_TX: J2.1 JP1.1 U1.47
VDD: C1.1 C28.1 C29.1 C30.1 C31.1 C32.1 C33.1 C34.1 C35.1 C36.1 C38.1 C39.1 C45.1 C46.1 C47.1 C48.1 C49.1 C50.1 J1.1 POS.1 Q1.D1 Q1.D2 Q1.D5 Q1.D6 Q1.D7 Q2.D1 Q2.D2 Q2.D5 Q2.D6 Q2.D7 U2.6 U2.7 U6.1 U8.12 U8.13

## Tracks (layer width: path | path; a pad name or v marks a point on that pad's centre or on a via)
+1.8V  (via drill 0.3)
  Top 0.3: v29,100 29.4,99.6 C42.1 29.68,98.72 U7.7 U7.6 | C9.1 6.25,78.75 TP5.1 | C9.1 v5,82 | U4.2 6.25,83.7 C9.1
  Bottom 0.3: v5,82 10,87 10,95 15,100 v29,100
  pour Top (no thermals): 30.45,96.2 30.45,98 30,98.45 30,99.1 29.2,99.9 29.2,97.95 29.55,97.6 29.55,96.2
+3V  (via drill 0.3)
  Top 0.2: JP4.1 11.46,32 J10.1 | J11.1 11.46,19 JP5.1 15,22.54 15,29.54 JP4.1 | JP7.1 108.54,15 J13.1 | C10.1 58.2,40.27 v59,41.07 U1.36 | v67,35 66.65,34.65 44.15,34.65 R6.P$1 40.95,31.45 28.05,31.45 R5.P$1 23.04,31.54 13,31.54 JP4.1
  Top 0.3: U3.2 68.25,36.7 C7.1 v67,35
  Route15 0.3: v59,41.07 65.07,35 v67,35 70,32 79.5,32 R7.P$1 83.5,32 97.5,32 R8.P$1 106.04,27.46 JP6.1 112.46,27.46 J12.1 TP4.1
  other vias: 113,23.5 67,31 67,33
  pour Top: 5.8,20.8 5.8,17.8 12.8,17.8 13.8,18.8 64.4,18.8 68.6,23 68.6,37.4 64.5,37.4 61.8,34.7 44.3,34.7 43,36 5.5,36 5.5,30.5 13.5,30.5 14,30 14,22.5 12.3,20.8
  pour Route15: 58,39.6 58,41 59,42 60.5,42 66.7,35.8 101.2,35.8 108,29 114,29 115,28 115,23 113.5,21.5 106.8,21.5 106,20.7 106,17 107,16 114,16 114.6,15.4 114.6,13.6 114,13 106,13 94.3,24.7 70.3,24.7 64,31 64,33.9
+3V3  (via drill 0.3)  (1 unrouted)
  Top 0.2: v48.2,45.36 48.24,45.32 49.02,45.32 C12.1 49.12,45.34 49.76,44.7 50.94,44.7 51.15,44.49 U1.24 | U1.75 68.2,56 68.4,56.2 C16.1 69.8,56.4 v70.5,56.4 | U1.64 68.55,50.49 68.96,50.9 C15.1 69.88,51.18 v70.5,51.18 | U1.49 65.5,40.6 C14.1 | v84.5,66.05 83.1,66.05 C44.1 82.26,66.89 82.19,66.89 81.91,67.17 81.91,68.56 82.25,68.9 U8.27 | J14.2 44,92.81 JP8.2 | R10.2 97,4.55 v97,5 | R12.2 78.45,4.45 v79,5 | R11.2 22.45,4.45 v23,5 | R9.2 40.45,4.45 v41,5 | v55.8,38.75 C18.1 59.28,38.75 59.61,39.09 59.61,39.81 59.18,40.25 C19.1 59.26,40.41 59.27,40.41 59.66,40.8 59.66,41.34 59.5,41.49 U1.37 | U5.5 46.54,42.05 46.54,40.44 46.98,39.99 47.04,39.99 C23.1 | R3.1 v53,29 | v52.6,57.45 C17.1 53.6,58.6 54,58.2 U1.100 | C13.1 50.95,52.95 v51,53 v51,53.01 51.49,53.5 U1.6 | C22.1 50.3,39.26 v50.35,39.3 50.8,39.3 51.16,39.66 51.16,40.47 49.38,42.25 U5.8 | JP2.1 24,93.35 J4.1
  Top 0.3: v5,88 5.05,87.95 6.2,87.95 C8.1 6.25,86.3 U4.3 | v31,100 30.6,99.6 C43.1 30.59,98.99 30.59,98.86 30.98,98.48 U7.5 | C14.1 66.4,40.4 v67,41 C6.1 68.25,39 68.2,38.95 U3.3
  Route15 0.2: v59,69 56.66,66.66 56.66,65.73 49.47,58.54 33.43,58.54 32.97,59 J9.1 | v59,70 53,64 16.14,64 10.5,58.36 7.64,58.36 J8.1 | J7.1 88,41.71 64.66,65.05 64.66,66.27 64.27,66.66 63.34,66.66 v61,69 61,62 66.5,56.5 | v61,70 66,65 96,65 106,55 106,43.2 107.74,41.46 111.52,41.46 111.98,41 J6.1 | v5,88 6,89 22.35,89 JP2.1 | JP8.2 41.81,89 28.35,89 JP2.1 | JP2.1 31,97.65 v31,100 | v97,5 94,8 76,8 | v79,5 76,8 | J3.1 68,8 76,8 | 44,8 26,8 v23,5 23,19 17.5,24.5 8,24.5 TP2.1 | v41,5 44,8 | J3.1 58,8 44,8 | J3.1 63,18 59,22 59,29 | 59,29 59,35.55 v55.8,38.75 | v55.8,38.75 56.5,39.45 56.5,42.15 57.6,43.25 63.75,43.25 66,41 v67,41 | v53,29 59,29 | v60,69 60,65.85 52.6,58.45 v52.6,57.45 52.6,54.6 v51,53 51,48.16 v48.2,45.36 48.2,41.45 v50.35,39.3 55.25,39.3 v55.8,38.75 | v70.5,56.4 66.6,56.4 66.5,56.5 | v70.5,51.18 66.5,55.18 66.5,56.5
  Bottom 0.3: v61,70 63.9,72.9 73.5,72.9 81.3,80.7 81.3,90.6 79.9,92
  other vias: 60,70 7,23.5
  pour Top (no thermals): 59.5,75 59.5,74.2 58.8,73.5 58.5,73.5 58.2,73.2 58.2,72.3 57.3,71.4 56.1,71.4 55.8,71.1 55.8,68.4 57.9,66.3 62.1,66.3 64.2,68.4 64.2,71.1 63.9,71.4 60.8,71.4 59.9,72.3 59.9,75
  pour Top (no thermals): 46.55,40.45 46.55,39.45 47.05,38.95 50.5,38.95 51.15,39.6 51.15,40.15 50.6,39.6 48.75,39.6 48.2,40.15 48.15,40.15 48.1,40.2 46.8,40.2
  pour Route15: 20,75 28,67 54,67 58,71 62,71 67,66 83,66 84,67 84.59,67 arc-45 87,66 97,66 108,55 108,41.7 113.7,41.7 113.7,39.7 113,39 106,39 103.4,36.4 67.6,36.4 61,43 58.3,43 57,41.7 57,39 61,35 61,33.2 70.2,24 94.3,24 98,20.3 98,4 96,4 96,6 80,6 80,4 78,4 78,6 42,6 42,4 40,4 40,6 24,6 24,4 22,4 22,6 14,14 14,20.5 12,22.5 6,22.5 6,24.5 12,24.5 14,26.5 14,56.3 12,58.3 6.3,58.3 6.3,60.26 12,60.26 14,62.26 14,82 10,86 5,86 4,87 4,89 5,90 21,90 23,92 23,98 30,98 30,101 32,101 32,92 34,90 43.2,90 43.2,98 44.3,98 44.8,97.5 44.8,94.2 46,93 46,89 44.4,87.4 25.4,87.4 20,82
AVDD1
  Top 0.2: U6.6 35,70.65 35,70 | 35,70 35.65,70 U6.7 | C40.2 33.3,68.3 35,70
  pour Top (no thermals): 32.9,67.4 32.9,68.45 34.75,70.3 34.75,70.75 35.2,70.75 35.2,70.45 35.45,70.2 35.75,70.2 35.75,69.75 35.55,69.75 33.8,68 33.8,67.4
BRIDGE1_EN
  Top 0.2: U1.65 68.56,51 69.56,52 73.24,52 75,53.76 75,55.45 R21.1
BRIDGE2_EN
  Top 0.2: U1.66 68.56,51.5 69.56,52.5 73.03,52.5 74.5,53.97 74.5,56.45 R22.1
DRV2_SNSOUT
  Top 0.2: U6.10 37.2,70.05 R15.1
DVDD2
  Top 0.2: R15.2 R14.2 C41.2 34.8,68.33 35.73,69.26 36,69.26 36.25,69.51 U6.8
ENCODER_1  (via drill 0.3)
  Top 0.2: U1.91 58.5,58.95 58.73,59.18 v58.73,60 | J14.3 42,92.27 JP8.3
  Bottom 0.2: JP8.3 41.27,91 41.27,69.23 46.16,64.34 54.39,64.34 v58.73,60
ENCODER_2  (via drill 0.3)
  Top 0.2: v57.77,60 57.77,59.18 58,58.95 U1.92 | J14.4 40,92.27 JP8.4
  Bottom 0.2: JP8.4 40.73,91 40.73,69.1 45.93,63.9 53.87,63.9 v57.77,60
GND  (via drill 0.3)  (1 unrouted)
  Top 0.2: C12.2 49.98,45.36 v50.9,45.36 51.26,45 U1.23 | U1.74 69.5,55.5 C16.2 v70.5,55.4 | U1.63 68.05,50 68.06,49.99 69.5,49.99 C15.2 69.72,50.22 v70.5,50.22 | U1.48 65,40.5 C14.2 64.9,39.4 v65.15,39.15 | R16.1 39.55,66.45 v40,66 | C44.2 82.55,68.17 v82.71,68.34 82.75,68.37 U8.28 | RM7.1 RM7.2 RM7.3 RM7.4 v86.25,59.2 | RM3.1 RM3.2 RM3.3 RM3.4 v111.25,59.2 | RM1.4 RM1.3 RM1.2 RM1.1 111.2,40.8 v111.25,40.8 | RM5.4 RM5.3 RM5.2 RM5.1 v86.25,40.8 | RM8.1 RM8.2 RM8.3 RM8.4 33.75,40.8 v33.7,40.8 | RM6.4 RM6.3 RM6.2 RM6.1 33.75,59.2 v33.7,59.2 | RM4.1 RM4.2 RM4.3 RM4.4 v8.7,40.8 | RM2.4 RM2.3 RM2.2 RM2.1 v8.7,59.2 | C20.2 50.5,43.36 51.41,42.45 v52.1,42.45 | JP8.5 38,92.81 J14.5 | JP4.3 11.46,28 J10.3 | JP5.3 11.46,15 J11.3 | JP7.3 108.54,19 J13.3 | JP6.3 108.54,32 J12.3 | U1.35 58.5,41.5 57.25,40.25 C18.2 | C5.2 v67,29 | C13.2 49.1,52.95 48.15,52 v48,52 v48,51 48.7,50.3 X1.2 | v52.6,60.6 C17.2 53.81,59.4 54.51,58.7 U1.99 54.5,56.8 55.3,56 v56.4,56 56.5,56.1 U1.95 | C26.2 21.25,18 SW4.3 | C24.2 39.25,18 SW2.3 | C27.2 77.25,18 SW5.3 | C25.2 95.25,18 SW3.3
  Top 0.3: U6.5 36.25,71.25 U6.27 | U7.4 30.98,92.03 v30,93 | C42.2 v27.55,99 | C43.2 v32.5,99
  other vias: 78,72 76,72 74,72 72,72 70,72 70,70 72,70 74,70 76,70 78,70 78,68 76,68 74,68 72,68 70,68 88,72 88,70 88,68 90,72 90,70 90,68 92,72 92,70 92,68 94,72 94,70 94,68 96,72 96,70 96,68 98,72 98,70 98,68 50,72 50,70 50,68 48,70 48,72 46,72 46,70 44,70 44,72 42,72 56,76 56,78 54,78 54,76 54,74 52,74 52,76 52,78 50,76 50,74 64,78 64,76 66,76 66,78 68,78 68,76 66,74 68,74 70,78 70,76 70,74 58,76 62,76 64,74 52,66 54,68 52,72 52,70 52,68 60,62 56,66 58,62 56,64 54,66 62,64 64,66 66,68 68,68 68,70 68,72 56,74 42,66 46,66 48,66 47,43 50.35,40.35 70.5,39.5 72,38 70.5,36.5 65,90.5 60,90.5 55,90.5 108,23.5 12,23.5 55.8,39.9 2,95 2,85 2,75 2,65 2,55 2,45 2,35 2,25 2,15 2,5 5,2 15,2 25,2 35,2 45,2 55,2 65,2 75,2 85,2 95,2 105,2 115,2 118,5 118,15 118,25 118,35 118,45 118,55 118,65 118,75 118,85 118,95 110,102 100,102 90,102 80,102 70,102 67,94 53,94 50,102 40,102 30,102 20,102 10,102 32,66 30,71 28,71 26,71 24,71 22,71 20,71 32,71 9,82 10,85 9,88 18,79 18,81 20,82 34,80 36,80 38,80 36,78 38,78 40,80 53,98.5 67,98.5 48.26,62.23 100.33,48.83 75.5,46.5 75.5,41 77.5,54.5 81,61.5 67,61.5 100,60 91.5,49 100,37.5 91.5,37.5 88,28.5 88.5,33 100.5,19.5 98.5,19.5 84,18 82.5,19.5 67,20 67,17 72,30.5 38.5,19.5 20.5,20 81,7 99,7 44,6.5 26,7 42,37 28,37 20,37 20,49 28,49 28,60 42,57.5 39.5,60.5 32,62 14,40 20,60 92,60 42,46 105,63 17,63
  pour Route2: 0,104 0,0 120,0 120,104
  pour Route2 (no thermals): 81,74 81,70 85,70 85,74
  pour Route2 (no thermals): 35,74 35,70 39,70 39,74
  cutout Route2: 92.5,60.5 92.5,39.5 arc90 94.5,37.5 97.5,37.5 arc90 99.5,39.5 99.5,60.5 arc90 97.5,62.5 94.5,62.5 arc90
  cutout Route2: 25.5,62.5 22.5,62.5 arc90 20.5,60.5 20.5,39.5 arc90 22.5,37.5 25.5,37.5 arc90 27.5,39.5 27.5,60.5 arc90
  pour Top (no thermals): 57,79.2 57,81.9 56.1,82.8 53.4,82.8 52.5,81.9 52.5,79 48.5,75 41.1,75 41.1,70.6 42.7,69 48.1,69 56.1,61 59.6,61 64.7,66.1 79,66.1 79.2,66.3 79.2,69.3 79.8,69.9 79.8,73.5 78.3,75 71.7,75 71.1,75.6 71.1,78 70.2,78.9 67.2,78.9 66.6,79.5 66.6,80.4 65.4,81.6 60.3,81.6 60,81.3 60,80.1 60.9,79.2 60.9,74.4 62.1,73.2 62.1,72.6 62.7,72 64.5,72 64.8,71.7 64.8,68.1 62.4,65.7 57.6,65.7 55.2,68.1 55.2,73.1 56,73.9 57.4,73.9 59.1,75.6 59.1,76.5 58.5,77.1 58.5,77.7
  cutout Route2: 111,89 111,80 115,80 115,89
  pour Top (no thermals): 32.7,81.45 32.7,79.7 37.2,75.2 37.2,73.5 36.9,73.2 38.1,73.2 37.8,73.5 37.8,75.9 42.1,80.2 42.1,81.45 40.8,81.45 40.8,81 40.2,80.4 38.8,80.4 38.4,80.8 38.4,81.45
  pour Top (no thermals): 78.3,75 79.8,75 81.3,73.5 84.3,73.5 84.7,73.9 84.7,74.8 113,74.8 114.3,73.5 114.3,71.4 114,71.1 106.8,71.1 102,66.3 88.2,66.3 87,67.5 87,68.4 86.4,69 84.9,69 84.7,69.2 84.7,70.1 84.45,70.35 81.15,70.35 79.8,69 78.9,69 78.3,69.6
  pour Top (no thermals): 38.1,72.6 38.3,72.4 39.4,72.4 41.1,74.1 41.4,74.1 41.4,70.3 39.6,72.1 38.2,72.1 38.1,72
  pour Top (no thermals): 38.1,66.9 47.7,66.9 49,65.6 49,65.4 6,65.4 6,68.7 12.9,68.7 14.4,70.2 14.4,74.1 7.5,81 7.5,90.8 12.3,95.6 12.3,98.4 15,98.4 15,93.9 13.8,92.7 13.8,91.2 16.2,88.8 22.2,88.8 22.5,88.5 22.5,83.4 21.7,82.6 21.7,81.7 19.8,79.8 19.8,75 29.1,75 30.7,73.4 31.7,73.4 32.1,73 32.1,71.4 32.4,71.1 32.4,67.2 33,66.6 35.1,66.6 35.7,66 37.8,66
  pour Top (no thermals): 46.6,43.35 46.6,42.7 46.95,42.35 46.95,40.65 48.55,40.65 49.15,40.05 50.5,40.05 50.5,40.5 49.35,41.65 47.75,41.65 47.55,41.85 47.55,43.35
  pour Top (no thermals): 69.5,34.5 70.5,34.5 73,37 73,39 70.5,41.5 69.5,41.5 69,41 69,38.2 66.9,38.2 65.1,40 65.1,41.6 65.05,41.65 64.95,41.65 64.75,41.45 64.75,38.25 65.2,37.8 69,37.8 69,35
  pour Bottom: 48.5,93.5 55,87 65,87 67,89 67,90.5 66.5,91 57,91 51.95,96.05 51.95,98.5 51.45,99 48.5,99
  pour Top (no thermals): 59.3,39.25 57.95,39.25 57.8,39.4 55.2,39.4 55.2,40.15 56.45,41.4 58.15,41.4 58.55,41.8 58.55,41.4 57.95,40.8 57.8,40.8 57.6,40.6 57.6,39.95 57.95,39.6 59.3,39.6
  pour Top (rank 2, no thermals): 15,98 16,99 25,99 26,98 35,98 35.5,98.5 36.2,98.5 37.4,97.3 37.4,96.7 37.75,96.35 38.3,96.35 38.65,96.7 38.65,97.3 39.85,98.5 42.5,98.5 45,101 50,101 51,100 51,89 53,87 64.5,87 70,92.5 70,100 77,100 77,94.5 78.2,93.3 85.3,93.3 88,96 104,96 109,91 109,83 108,82 108,76 106,74 109,74 110,73 113,73 114,72 114,71 115,70 115,45 113,43 115,41 115,34 113,32 115,30 115,21 113,19 115,17 115,12 106,3 96,3 95,4 94,4 93,3 78,3 77,4 74,4 69,9 59,9 58,10 58,13 57,14 56,13 56,10 55,9 51,9 45,3 40,3 39,4 38,4 37,3 22,3 21.5,3.5 21.5,6.71 13,15.3 8.1,15.3 7.6,15.8 5,15.8 5,27 10.6,27 11.2,26.4 12.5,26.4 13,26.9 13,27.9 12.5,28.4 11.7,28.4 11.1,29 5,29 5,56 7.5,56 8,56.5 8,57.5 7.5,58 5,58 5,64 7,66 7,68 5,70 5,80 4,81 4,89 5,90 9,90 13,94 13,104 0,104 0,0 120,0 120,104 14,104 14,98
  pour Top: 11,104 15,104 15,96 11,96
  cutout Top: 111,89 111,80 115,80 115,89
  pour Route15 (rank 2): 3,90 4,91 13,91 15,93 15,98 17,100 21,100 23,102 33,102 37,98 37,94 35.9,92.9 35.9,91.5 36.6,90.8 37.8,90.8 39,92 39,97 42,100 47,100 50,97 50,93 54,89 64,89 69,94 69,99 71,101 77,101 77,94.5 78.2,93.3 85.3,93.3 88,96 104,96 109,91 109,83 108,82 108,76 105,73 105,72 106,71 114,71 115,70 115,44 112.7,44 112.2,43.5 112.2,42.5 112.7,42 114.5,42 115,41.5 115,38.4 114.5,37.9 111.4,37.9 107,33.5 107,31.7 107.5,31.2 115.8,31.2 116,31 116,22 114.7,20.7 107.5,20.7 106.7,19.9 106.7,19 107.5,18.2 116,18.2 116,12 107,3 96,3 95,4 94,4 93,3 78,3 77,4 76,4 75,3 40,3 39,4 38,4 37,3 22,3 14,11 14,15 13,16 6,16 5,17 5,26 13,26 13,29 6,29 5,30 5,56.3 7.7,56.3 7.7,57.7 5,57.7 5,65 7,67 10,67 11,66 13,66 13,68 12,69 6,69 5,70 5,80 3,82 3,89 0,89 0,0 120,0 120,104 0,104 0,90
  pour Route15 (rank 2): 0,91 0,88 3,88 3,91
  cutout Route15: 111,89 111,80 115,80 115,89
  pour Route15 (rank 6): 0,104 0,0 120,0 120,103 120,104
  pour Bottom (rank 6): 0,104 0,0 120,0 120,104
  cutout Bottom (rank 6): 111,89 111,80 115,80 115,89
  pour Top (rank 6): 0,104 0,0 120,0 120,104
  cutout Top: 27.5,60.5 27.5,39.5 arc-90 25.5,37.5 22.5,37.5 arc-90 20.5,39.5 20.5,60.5 arc-90 22.5,62.5 25.5,62.5 arc-90
  cutout Route15: 25.5,37.5 22.5,37.5 arc-90 20.5,39.5 20.5,60.5 arc-90 22.5,62.5 25.5,62.5 arc-90 27.5,60.5 27.5,39.5 arc-90
  cutout Bottom: 25.5,62.5 22.5,62.5 arc90 20.5,60.5 20.5,39.5 arc90 22.5,37.5 25.5,37.5 arc90 27.5,39.5 27.5,60.5 arc90
  cutout Top: 72.5,44.5 75,42 76,42 76.5,42.5 73.5,45.5
  cutout Top: 76.5,42.5 88,31 87,30 87,31 76,42
GND1
  cutout Top: 99.5,60.5 99.5,39.5 arc-90 97.5,37.5 94.5,37.5 arc-90 92.5,39.5 92.5,60.5 arc-90 94.5,62.5 97.5,62.5 arc-90
GND2
  cutout Route15: 97.5,37.5 94.5,37.5 arc-90 92.5,39.5 92.5,60.5 arc-90 94.5,62.5 97.5,62.5 arc-90 99.5,60.5 99.5,39.5 arc-90
GND3
  cutout Bottom: 97.5,62.5 94.5,62.5 arc90 92.5,60.5 92.5,39.5 arc90 94.5,37.5 97.5,37.5 arc90 99.5,39.5 99.5,60.5 arc90
I2C3_SCL  (via drill 0.3)
  Top 0.2: U1.67 66.75,52 65.72,50.97 v65,51 | J5.2 JP3.2
  Bottom 0.2: JP3.2 16.3,70 23.3,63 38.12,63 49.82,51.3 64.7,51.3 v65,51
I2C3_SDA  (via drill 0.3)
  Top 0.2: U1.68 66.69,52.5 66.21,52.02 v65,52 | J5.1 11.46,72 JP3.1
  Bottom 0.2: v65,52 64.7,51.7 50,51.7 38.34,63.36 23.48,63.36 14.3,72.54 JP3.1
ICM_CS
  Top 0.2: U5.12 47.5,43.96 47.8,44.27 48.85,44.27 49.12,43.99 50.44,43.99 51.29,43.15 53.1,43.15 U1.26
ICM_INT1  (via drill 0.3)
  Top 0.2: U5.4 v45.85,41.02 | U1.30 56.01,42.95 55,43.96 v55,44
  Bottom 0.2: v45.85,41.02 46.85,41.02 49.83,44 v55,44
ICM_INT2  (via drill 0.3)
  Top 0.2: v56,44 56.5,43.5 U1.31 | U5.9 50.11,42.75 51.15,41.71 v51.15,41.7
  Bottom 0.2: v51.15,41.7 53.7,41.7 v56,44
ICM_MISO
  Top 0.2: U5.1 45.4,43.75 45.1,43.45 45.1,40.19 46.69,38.6 52.47,38.6 55,41.13 U1.28
ICM_MOSI
  Top 0.2: U1.29 55.5,41.1 52.65,38.25 46.55,38.25 44.75,40.05 44.75,43.61 45.31,44.17 46.5,44.17 U5.14
ICM_SCK
  Top 0.2: U5.13 47,44.3 47.34,44.64 49.12,44.64 49.41,44.35 50.7,44.35 51.54,43.52 53.84,43.52 54.5,42.86 U1.27
M2
  Top 0.2: U7.3 30.32,88.78 R13.2
  pour Top (no thermals): 31.2,88.8 30.75,88.8 30.3,88.35 30.3,87.3 30.6,87 34.9,87 35.7,87.8 35.7,95.7 36.6,96.6 36.6,97.2 36.3,97.5 35.7,97.5 32.7,94.5 32.7,90.3
M_GH1  (via drill 0.3)
  Top 0.2: v43.8,81 43.8,80.6 39.95,76.75 39.95,73.53 39.18,72.75 U6.17 | v50.5,83.5 49.92,82.92 Q1.G3
  Bottom 0.2: v43.8,81 46.3,83.5 v50.5,83.5
M_GH2
  Top 0.2: U6.24 35.75,74.55 27.65,82.65 Q2.G3
M_GL1  (via drill 0.3)
  Top 0.2: U6.19 38.25,74.31 v38.94,75 | v39.2,81.2 39.35,81.35 Q3.G3
  Bottom 0.2: v38.94,75 39.2,75.26 v39.2,81.2
M_GL2
  Top 0.2: Q4.G3 32.08,79.52 36.75,74.85 U6.22
M_IN1
  Top 0.2: U1.93 57.5,58.95 47.95,68.5 42.48,68.5 39.23,71.75 U6.15
M_IN2
  Top 0.2: U1.94 57,58.85 47.85,68 42.48,68 39.23,71.25 U6.14
M_NFAULT  (via drill 0.3)
  Top 0.2: U1.96 56,59.3 47.9,67.4 40.6,67.4 v40,68 | U6.9 36.75,68.2 R14.1 36.1,68.5 v36,68.6
  Bottom 0.2: v36,68.6 39.4,68.6 v40,68
M_NSLEEP  (via drill 0.3)
  Top 0.2: U1.90 v59,56 | v40,69 38.9,70.1 U6.13
  Bottom 0.2: v59,56 57,58 57,59.7 53.2,63.5 45.6,63.5 40.1,69 v40,69
M_SH1
  Top 0.2: U6.18 39.1,73.25 39.6,73.75 39.6,76.9 42.9,80.2 42.9,82.2 42.45,82.65 Q3.D6
  pour Top (no thermals): 37.8,81.9 44.1,81.9 44.75,82.55 49.4,82.55 49.4,83 49.6,83.2 49.6,99 49,99.6 45.9,99.6 45,98.7 45,93.9 46.2,92.7 46.2,90.9 45.3,90 41.1,90 37.8,86.7
M_SH2
  Top 0.2: Q4.D2 31,82 31,79.93 36.25,74.68 U6.23 | U7.2 29.68,88.78 R13.1
  pour Top (no thermals): 23.4,82.55 25.2,82.55 25.2,82.8 25.5,83.1 27.9,83.1 29.1,81.9 36.6,81.9 36.6,84.75 34.95,86.4 30.3,86.4 29.7,87 29.7,88.4 29.3,88.8 23.7,88.8 23.4,88.5
MOTOR_CS  (via drill 0.3)
  Top 0.2: U7.8 29.02,94.97 v30,94 | v54,56 58,52 58,44.01 57,43.01 U1.32
  Bottom 0.2: v30,94 30.35,94 31.01,93.34 31.01,70.99 35,67 40,67 51,56 v54,56
N$1
  Top 0.2: U1.12 51.3,50.51 50.3,51.5 X1.3
N$2
  Top 0.2: U1.13 51.24,50 50.34,49.1 X1.1
N$3  (via drill 0.3)
  Top 0.2: D16.- v111.25,57 | RM3.5 109.95,61.7 110.19,61.94 v110.19,62.25
  Bottom 0.2: v111.25,57 110.16,58.09 110.16,62.22 v110.19,62.25
N$4  (via drill 0.3)
  Top 0.2: D14.- v111.25,55 | RM3.6 109.15,62.03 109.23,62.11 v109.23,62.25
  Bottom 0.2: v111.25,55 109.23,57.02 v109.23,62.25
N$5  (via drill 0.3)
  Top 0.2: D12.- v111.25,53 | RM3.7 108.35,62.03 108.27,62.11 v108.27,62.25
  Bottom 0.2: v111.25,53 108.27,55.98 v108.27,62.25
N$6  (via drill 0.3)
  Top 0.2: D10.- v111.25,51 | RM3.8 107.55,61.7 107.31,61.94 v107.31,62.25
  Bottom 0.2: v111.25,51 107.31,54.94 v107.31,62.25
N$7  (via drill 0.3)
  Top 0.2: R4.1 v56,73 | v70,80 D1.+
  Bottom 0.2: v56,73 57,73 64,80 v70,80
N$8  (via drill 0.3)
  Top 0.2: U8.30 83.75,68.88 84.95,67.67 84.95,67.05 v85,67 | v75,62 R17.2
  Bottom 0.2: v75,62 77.7,64.7 81.16,64.7 83.28,66.83 83.28,67.3 83.68,67.71 84.49,67.71 85,67.2 v85,67
N$9
  Top 0.2: D2.- 111.1,43 111.91,42.19 111.91,40.08 111.03,39.2 RM1.8
N$10  (via drill 0.3)
  Top 0.2: D4.- v111.25,45 | RM1.7 109.15,37.97 109.23,37.89 v109.23,37.75
  Bottom 0.2: v109.23,37.75 109.23,42.98 v111.25,45
N$11  (via drill 0.3)
  Top 0.2: D6.- v111.25,47 | RM1.6 108.35,37.97 108.27,37.89 v108.27,37.75
  Bottom 0.2: v111.25,47 108.28,44.03 108.28,37.76 v108.27,37.75
N$12  (via drill 0.3)
  Top 0.2: D8.- v111.25,49 | RM1.5 107.55,38.3 107.31,38.06 v107.31,37.75
  Bottom 0.2: v111.25,49 107.24,44.99 107.31,44.92 v107.31,37.75
N$15  (via drill 0.3)
  Top 0.2: U8.11 83.75,75.75 v84,76 | R18.2 v73.5,62
  Bottom 0.2: v84,76 85,75 85,67.93 85.66,67.27 85.66,65.91 83.65,63.9 80.9,63.9 77.75,60.75 74.35,60.75 73.5,61.6 v73.5,62
N$16  (via drill 0.3)
  Top 0.2: U8.15 81.75,74.85 81.75,75.25 v81,76 | R19.2 v72,62
  Bottom 0.2: v72,62 75.45,65.45 80.65,65.45 81.71,66.51 81.71,67.34 80.49,68.56 80.49,75.49 v81,76
N$18  (via drill 0.3)
  Top 0.2: U8.26 81.75,69.13 80.99,68.36 80.99,67.01 v81,67 | R20.2 v70.5,62
  Bottom 0.2: v70.5,62 74.4,65.9 79.9,65.9 v81,67
N$19  (via drill 0.3)
  Top 0.2: v84,67 84,68.13 83.25,68.88 U8.29 | R21.2 v78,62
  Route15 0.2: v84,67 84,69 89,74 100,74 104,78 104,84 TP37.1
  Bottom 0.2: v84,67 81.3,64.3 80.3,64.3 v78,62
  other vias: 106,86
N$20  (via drill 0.3)
  Top 0.2: U8.14 82.26,74.49 82.26,75.73 v82,76 | R22.2 v76.5,62
  Route15 0.2: v82,76 83,75 100,75 103,78 103,85 100,88 88,88 TP38.1
  Bottom 0.2: v82,76 82,75.85 81.04,74.89 81.04,68.56 82.11,67.49 82.11,66.26 80.91,65.06 76.06,65.06 74.3,63.3 74.3,61.5 74.6,61.2 75.7,61.2 v76.5,62
  other vias: 86,86
N$21
  Top 0.3: U2.3 60.33,73.22 R1.1 R2.2
N$23
  Top 0.2: D18.- 86,43 86.91,42.09 86.91,39.98 86.13,39.2 RM5.8
N$24
  Top 0.2: U6.3 34.45,72.25 34,71.8 34,71 33.4,70.4 C37.1
N$25  (via drill 0.3)
  Top 0.2: D20.- v86.25,45 | RM5.7 84.15,37.97 84.23,37.89 v84.23,37.75
  Bottom 0.2: v86.25,45 84.23,42.98 v84.23,37.75
N$26  (via drill 0.3)
  Top 0.2: D22.- v86.25,47 | RM5.6 83.35,37.97 83.27,37.89 v83.27,37.75
  Bottom 0.2: v86.25,47 83.27,44.02 v83.27,37.75
N$27  (via drill 0.3)
  Top 0.2: D24.- v86.25,49 | RM5.5 82.55,38.3 82.31,38.06 v82.31,37.75
  Bottom 0.2: v86.25,49 82.31,45.06 v82.31,37.75
N$28  (via drill 0.3)
  Top 0.2: D26.- v86.25,51 | RM7.8 82.55,61.7 82.31,61.94 v82.31,62.25
  Bottom 0.2: v86.25,51 82.01,55.24 82.01,61.95 v82.31,62.25
N$29  (via drill 0.3)
  Top 0.2: D28.- v86.25,53 | RM7.7 83.35,62.03 83.27,62.11 v83.27,62.25
  Bottom 0.2: v86.25,53 83.27,55.98 v83.27,62.25
N$30  (via drill 0.3)
  Top 0.2: D30.- v86.25,55 | RM7.6 84.15,62.03 84.23,62.11 v84.23,62.25
  Bottom 0.2: v86.25,55 84.23,57.02 v84.23,62.25
N$31  (via drill 0.3)
  Top 0.2: D32.- v86.25,57 | RM7.5 84.95,61.7 85.19,61.94 v85.19,62.25
  Bottom 0.2: v86.25,57 85.19,58.06 v85.19,62.25
N$32
  Top 0.2: U6.4 34.65,71.75 34.4,71.5 34.4,70.6 33.4,69.6 C37.2
N$33
  Top 0.2: U6.2 33.5,72.75 C36.2
N$34
  Top 0.2: D3.- 9.02,57 8.04,57.98 8.04,59.97 8.88,60.81 RM2.8
N$35  (via drill 0.3)
  Top 0.2: D5.- v8.7,55 | RM2.7 10.85,62.03 10.77,62.11 v10.77,62.2
  Bottom 0.2: v10.77,62.2 10.77,57.07 v8.7,55
N$36  (via drill 0.3)
  Top 0.2: D7.- v8.7,53 | RM2.6 11.65,62.03 11.73,62.11 v11.73,62.2
  Bottom 0.2: v11.73,62.2 11.73,56.03 v8.7,53
N$37
  Top 0.2: U6.12 38.25,67.6 R16.2
N$38  (via drill 0.3)
  Top 0.2: D9.- v8.7,51 | RM2.5 12.45,61.7 12.69,61.94 v12.69,62.2
  Bottom 0.2: v12.69,62.2 12.69,54.99 v8.7,51
N$39  (via drill 0.3)
  Top 0.2: RM4.8 12.5,39.15 12.5,38.3 12.74,38.06 v12.74,37.9 | D11.- v8.7,49
  Bottom 0.2: v12.74,37.9 12.74,44.96 v8.7,49
N$40  (via drill 0.3)
  Top 0.2: RM4.7 11.7,39.15 11.7,37.97 v11.77,37.89 | D13.- v8.7,47
  Bottom 0.2: v11.77,37.89 11.77,43.93 v8.7,47
N$41  (via drill 0.3)
  Top 0.2: RM4.6 10.85,37.97 v10.78,37.89 | D15.- v8.7,45
  Bottom 0.2: v10.78,37.89 10.78,42.92 v8.7,45
N$42  (via drill 0.3)
  Top 0.2: RM4.5 10.05,38.3 9.81,38.06 v9.81,37.9 | D17.- v8.7,43
  Bottom 0.2: v9.81,37.9 9.81,41.89 v8.7,43
N$43
  Top 0.2: D19.- 33.99,57 33.04,57.94 33.04,59.87 34.03,60.86 35,60.86 RM6.8
N$44  (via drill 0.3)
  Top 0.2: RM6.7 35.85,61.78 35.77,61.86 v35.77,62 | D21.- v33.7,55
  Bottom 0.2: v35.77,62 35.77,57.07 v33.7,55
N$45  (via drill 0.3)
  Top 0.2: RM6.6 36.65,61.78 36.73,61.86 v36.73,62 | D23.- v33.7,53
  Bottom 0.2: v36.73,62 36.73,56.03 v33.7,53
N$46  (via drill 0.3)
  Top 0.2: RM6.5 37.45,61.45 37.69,61.69 v37.69,62 | D25.- v33.7,51
  Bottom 0.2: v37.69,62 37.69,54.99 v33.7,51
N$47  (via drill 0.3)
  Top 0.2: RM8.8 37.45,38.3 37.69,38.06 v37.69,37.75 | D27.- v33.7,49
  Bottom 0.2: v37.69,37.75 37.69,45.01 v33.7,49
N$48  (via drill 0.3)
  Top 0.2: RM8.7 36.65,37.97 36.73,37.89 v36.73,37.75 | D29.- v33.7,47
  Bottom 0.2: v36.73,37.75 36.73,43.97 v33.7,47
N$49  (via drill 0.3)
  Top 0.2: RM8.6 35.85,37.97 35.77,37.89 v35.77,37.75 | D31.- v33.7,45
  Bottom 0.2: v35.77,37.75 35.77,42.93 v33.7,45
N$50  (via drill 0.3)
  Top 0.2: RM8.5 35.05,38.3 34.81,38.06 v34.81,37.75 | D33.- v33.7,43
  Bottom 0.2: v34.81,37.75 34.81,41.89 v33.7,43
PA0  (via drill 0.3)
  Top 0.2: v46,46.6 46.56,46.6 46.87,46.9 51.05,46.9 51.45,46.5 U1.20 | J10.2 JP4.2
  Bottom 0.2: v46,46.6 40.05,40.65 40.05,38.45 31.6,30 JP4.2
PA1  (via drill 0.3)
  Top 0.2: U1.21 51.25,46 50.85,46.4 47,46.4 46.2,45.6 v46,45.6 | JP5.2 J11.2
  Bottom 0.2: v46,45.6 40.5,40.1 40.5,38.4 32.23,30.13 32.23,27.18 24.04,19 14,19 JP5.2
PA2  (via drill 0.3)
  Top 0.2: v53.8,45.7 53.6,45.5 U1.22 | JP6.2 J12.2
  Bottom 0.2: v53.8,45.7 54.2,45.3 66.7,45.3 73.5,38.5 73.5,33.5 77,30 JP6.2
PA3  (via drill 0.3)
  Top 0.2: U1.25 53.14,44 v53.8,44.66 | JP7.2 J13.2
  Bottom 0.2: v53.8,44.66 54,44.86 66.65,44.86 73.1,38.4 73.1,33.3 76.8,29.6 95.4,29.6 JP7.2
PB12
  Top 0.152: 26.95,18.7 67.49,18.7 70.19,21.4 70.19,31.49 74,35.3
  Top 0.2: U1.51 72,44 74,42 74,35.3 | 26.95,18.7 SW4.1 | R11.1 24.3,4.75 SW4.2 24,6.29 24,15.75 SW4.1 | C26.1 24.75,18 SW4.1
PB13
  Top 0.152: 68,18 71,21 71,31.2 74.7,34.9
  Top 0.2: U1.52 72.5,44.5 74.7,42.3 74.7,34.9 | 68,18 44.25,18 SW2.1 | R9.1 42.3,4.75 SW2.2 42,6.29 42,15.75 SW2.1 | C24.1 42.75,18 SW2.1
PB14
  Top 0.2: U1.53 73,45 87,31 87,22.75 81.62,17.38 81.38,17.38 | R12.1 80.3,4.75 SW5.2 80,6.29 80,15.75 SW5.1 81.38,17.38 | C27.1 80.75,18 81.38,17.38
PB15
  Top 0.2: U1.54 73.5,45.5 88,31 93,31 99.5,24.5 SW3.1 | R10.1 98.3,4.75 SW3.2 98,6.29 98,15.75 SW3.1 | C25.1 98.75,18 SW3.1
PC0  (via drill 0.3)
  Top 0.2: U1.15 51.51,49 50.28,47.77 47.03,47.77 46.2,48.6 v46,48.6
  Bottom 0.2: v46,48.6 39.6,42.2 39.6,38.5 33.1,32 25,32 R5.P$2
PC1  (via drill 0.3)
  Top 0.2: U1.16 51.51,48.5 50.32,47.32 46.88,47.32 46.6,47.6 v46,47.6
  Bottom 0.2: v46,47.6 47,46.6 47,45 41,39 R6.P$2
PC2  (via drill 0.3)
  Top 0.2: v53.8,47.73 53.53,48 U1.17
  Bottom 0.2: v53.8,47.73 65.27,47.73 R7.P$2
PC3  (via drill 0.3)
  Top 0.2: U1.18 52.97,47.5 v53.8,46.67
  Bottom 0.2: v53.8,46.67 65.83,46.67 74,38.5 74,33.7 77.3,30.4 95.4,30.4 97,32 R8.P$2
PD0
  Top 0.2: U1.82 63,58.75 67.16,62.91 98.34,62.91 102.75,58.5 102.75,48 107.7,43.05 D2.+ 108.7,44 112,44 J6.3
PD1
  Top 0.2: U1.83 62.5,58.96 66.8,63.26 98.7,63.26 103.25,58.71 103.25,49.5 107.7,45.05 D4.+ 108.7,46 112,46 J6.4
PD2
  Top 0.2: U1.84 62,59.16 66.45,63.61 99.05,63.61 103.75,58.91 103.75,51 107.7,47.05 D6.+ 108.7,48 112,48 J6.5
PD3
  Top 0.2: U1.85 61.5,59.37 66.09,63.96 99.41,63.96 104.25,59.12 104.25,52.45 D8.+ 108.7,50 112,50 J6.6
PD4
  Top 0.2: U1.86 61,59.58 65.74,64.32 99.76,64.32 104.75,59.33 104.75,53.95 D10.+ 108.7,52 112,52 J6.7
PD5
  Top 0.2: U1.87 60.5,59.79 65.38,64.67 100.12,64.67 105.25,59.54 105.25,55.45 D12.+ 108.7,54 112,54 J6.8
PD6
  Top 0.2: U1.88 60,59.99 65.03,65.02 100.47,65.02 105.75,59.74 105.75,57 107.7,55.05 D14.+ 108.6,55.9 111.9,55.9 J6.9
PD7
  Top 0.2: U1.89 59.5,60.2 64.67,65.37 100.83,65.37 106.25,59.95 106.25,58.5 107.7,57.05 D16.+ 108.7,58 112,58 J6.10
PD8
  Top 0.2: U1.55 73.5,46 75.75,48.25 77.45,48.25 D18.+ 83.7,44 87,44 J7.3
PD9
  Top 0.2: J7.4 87,46 83.7,46 D20.+ 78.95,48.75 75.54,48.75 73.29,46.5 U1.56
PD10
  Top 0.2: J7.5 87,48 83.7,48 D22.+ 80.45,49.25 75.34,49.25 73.09,47 U1.57
PD11
  Top 0.2: J7.6 87,50 83.7,50 D24.+ 81.95,49.75 75.13,49.75 72.88,47.5 U1.58
PD12
  Top 0.2: J7.7 87,52 83.7,52 D26.+ 81.95,50.25 74.92,50.25 72.67,48 U1.59
PD13
  Top 0.2: J7.8 87,54 83.7,54 D28.+ 80.45,50.75 74.71,50.75 72.46,48.5 U1.60
PD14
  Top 0.2: J7.9 87,56 83.7,56 D30.+ 78.95,51.25 74.51,51.25 72.26,49 U1.61
PD15
  Top 0.2: J7.10 87,58 83.7,58 D32.+ 82.7,56.75 77.7,51.75 74.3,51.75 72.05,49.5 U1.62
PE0
  Top 0.2: U1.97 55.5,59.25 49.59,65.17 20.68,65.17 12.51,57 D3.+ 11.3,56 8,56 J8.3
PE1
  Top 0.2: U1.98 55,59.25 49.43,64.81 20.82,64.81 13.39,57.38 13.39,56.09 D5.+ 11.3,54 8,54 J8.4
PE2
  Top 0.2: U1.1 51,56 42.54,64.46 20.97,64.46 13.74,57.23 13.74,54.44 D7.+ 11.3,52 8,52 J8.5
PE3
  Top 0.2: U1.2 50.79,55.5 42.18,64.11 21.12,64.11 14.09,57.08 14.09,52.79 D9.+ 11.3,50 8,50 J8.6
PE4
  Top 0.2: U1.3 50.59,55 41.83,63.76 21.26,63.76 14.44,56.94 14.44,51.14 D11.+ 11.3,48 8,48 J8.7
PE5
  Top 0.2: U1.4 50.38,54.5 41.47,63.41 21.41,63.41 14.79,56.79 14.79,49.49 D13.+ 11.3,46 8,46 J8.8
PE6
  Top 0.2: U1.5 50.17,54 41.12,63.05 21.55,63.05 15.15,56.65 15.15,47.85 D15.+ 11.3,44 8,44 J8.9
PE7
  Top 0.2: J8.10 8,42 11.3,42 D17.+ 12.5,43 15.5,46 15.5,56.5 21.7,62.7 39.9,62.7 40.9,61.7 40.9,43.4 46.45,37.85 58.92,37.85 60.01,38.93 60.01,41.48 60,41.49 U1.38
PE8
  Top 0.2: J9.3 33,56 36.3,56 D19.+ 40.5,53.8 40.5,43.3 46.3,37.49 59.07,37.49 60.52,38.94 60.52,40.26 60.5,40.27 U1.39
PE9
  Top 0.2: U1.40 61,38.84 59.3,37.14 46.15,37.14 40.15,43.15 40.15,52.15 D21.+ 36.3,54 33,54 J9.4
PE10
  Top 0.2: U1.41 61.5,38.63 59.66,36.79 46.01,36.79 39.8,43 39.8,50.51 D23.+ 36.3,52 33,52 J9.5
PE11
  Top 0.2: U1.42 62,38.42 60.01,36.44 45.86,36.44 39.44,42.86 39.44,48.86 D25.+ 36.3,50 33,50 J9.6
PE12
  Top 0.2: U1.43 62.5,38.22 60.37,36.09 45.72,36.09 39.09,42.71 39.09,47.21 D27.+ 36.3,48 33,48 J9.7
PE13
  Top 0.2: U1.44 63,38.01 60.72,35.73 45.57,35.73 38.74,42.56 38.74,45.56 D29.+ 36.3,46 33,46 J9.8
PE14
  Top 0.2: U1.45 63.5,37.8 61.08,35.38 45.42,35.38 38.39,42.42 38.39,43.91 D31.+ 36.3,44 33,44 J9.9
PE15
  Top 0.2: U1.46 64,37.6 61.43,35.03 45.27,35.03 D33.+ 36.3,42 33,42 J9.10
PO1  (via drill 0.3)
  Top 0.3: U8.31 84.25,68.95 85.2,68 v85.9,68
  Bottom 0.3: v85.9,68 85.9,75.9 91.35,81.35 95.16,81.35 JP9.1 99.81,89.31 J15.1
PO2  (via drill 0.3)
  Top 0.3: U8.10 84.25,75.25 v85,76
  Bottom 0.3: v85,76 91,82 93.27,82 JP9.2 97.27,91.77 J15.2
PO3  (via drill 0.3)
  Top 0.3: U8.16 81.25,74.75 v80,76
  Bottom 0.3: v80,76 87.35,83.35 92.35,83.35 94.73,85.73 JP9.3 94.73,91.77 J15.3
PO4  (via drill 0.3)
  Top 0.3: U8.25 81.25,69.25 v80,68
  Bottom 0.3: v80,68 79,69 79,76 87,84 90.19,84 JP9.4 92.19,89.31 J15.4
POWER_OUT1
  Top 0.2: U1.69 72.82,53 74,54.18 74,57.45 R17.1
POWER_OUT2
  Top 0.2: U1.70 72.61,53.5 73.5,54.39 R18.1
POWER_OUT3
  Top 0.2: U1.71 72.41,54 73,54.59 73,57.45 R19.1
POWER_OUT4
  Top 0.2: U1.72 72.2,54.5 72.5,54.8 72.5,56.45 R20.1
REG
  Top 0.2: U5.11 48.81,43.75 C20.1
RST  (via drill 0.3)
  Top 0.2: U1.14 53.85,49.51 57,46.36 v57,44 | R3.2 53,25 54,24 61,24 | SW1.1 61,31.75 61,24 | 61,24 61,22.29 SW1.2 67,25.21 C5.1
  Bottom 0.2: v57,44 57,39.8 62.5,34.3 SW1.1
SPI3_MISO  (via drill 0.3)
  Top 0.2: U1.80 64,55.99 v63,54.99 | J4.3 20,92.27 JP2.3
  Bottom 0.2: v63,54.99 62.7,54.69 48.98,54.69 38.91,64.76 24.11,64.76 16.09,72.79 16.09,87.82 JP2.3
SPI3_MOSI  (via drill 0.3)
  Top 0.2: U1.81 63.5,56.5 v63,56 | J4.2 22,92.81 JP2.2
  Bottom 0.2: v63,56 62.1,55.1 49.1,55.1 39.07,65.13 24.27,65.13 16.5,72.9 16.5,85.69 JP2.2
SPI3_SCK  (via drill 0.3)
  Top 0.2: U1.79 64.5,55.48 v63,53.98 | J4.4 18,92.27 JP2.4
  Bottom 0.2: v63,53.98 62.7,54.28 48.86,54.28 38.73,64.41 23.93,64.41 15.63,72.71 15.63,89.9 JP2.4
SPI_CS  (via drill 0.3)
  Top 0.2: v63,52.97 65,54.97 U1.78 | J4.5 16,92.81 JP2.5
  Bottom 0.2: JP2.5 15.19,72.62 23.8,64.01 38.52,64.01 39.7,62.83 39.7,62.8 48.63,53.87 62.1,53.87 v63,52.97
SWCLK  (via drill 0.3)
  Top 0.2: v63.5,44 63.8,44.3 63.8,52.94 65.5,54.64 U1.77
  Bottom 0.2: v63.5,44 63.8,43.7 63.8,32.2 59.8,28.2 59.8,13.8 J3.3
SWDIO  (via drill 0.3)
  Top 0.2: U1.76 66,54.64 64.2,52.84 64.2,44.3 v64.5,44
  Bottom 0.2: v64.5,44 64.2,43.7 64.2,32.09 60.2,28.09 60.2,13.8 J3.2
USART3_RX  (via drill 0.3)
  Top 0.2: U1.50 66,43.3 65.66,43.64 65.66,49.34 v65,50 | JP1.2 J2.2
  Bottom 0.2: v65,50 67.54,50 80.98,63.45 101.45,63.45 JP1.2
USART3_TX  (via drill 0.3)
  Top 0.2: U1.47 64.5,43.07 65.16,43.73 65.16,48.84 v65,49 | JP1.1 108.54,68 J2.1
  Bottom 0.2: JP1.1 103.56,63.02 81.11,63.02 67.08,49 v65,49
VDD  (via drill 0.3)
  Top 0.2: U6.1 33.5,73.25 C36.1
  other vias: 46,80 47,80 48,80 49,80 50,80 50,79 49,79 48,79 47,79 46,79 45,79 44,79 24,79 25,79 26,79 27,79 28,79 29,79 30,79 24,80 25,80 26,80 27,80 59,84 60,84 61,84 61,83 60,83 59,83 45,80 29,80 28,80 72,80 73,80 74,80 75,80 76,80 77,80 78,80 78,79 77,79 76,79 75,79 74,79 73,79 72,79 92,80 92,79 93,79 93,80 94,80 94,79 95,79 95,80 96,80 96,79 97,79 97,80 98,80 98,79 73,98 73,97 73,96 73,94 73,95 74,94 74,95 74,96 74,97 74,98 75,98 75,97 75,96 75,95 75,94
  pour Top (no thermals): 58.5,84.6 57.6,83.7 57.6,79.2 58.5,78.3 59.1,78.3 59.5,77.9 59.5,77.2 59.6,77.1 60.4,77.1 60.5,77.2 60.5,78.8 59.4,79.9 59.4,81.6 60,82.2 61.5,82.2 61.8,82.5 61.8,84.3 61.5,84.6
  pour Top (no thermals): 41.1,75.6 48.3,75.6 51.9,79.2 51.9,82.1 46.1,82.1 41.1,77.1
  pour Top (no thermals): 22.3,82.1 27.5,82.1 31.5,78.1 31.5,75.6 20.4,75.6 20.4,79.5 22.3,81.4
  pour Top (no thermals): 35.3,73.2 32.7,73.2 32,73.9 31,73.9 29.1,75.8 29.1,75.9 31.3,78.1 31.5,78.1 35.3,74.3
  pour Top (no thermals): 50.4,81.9 51.5,83 51.5,84.9 54.7,88.1 79.9,88.1 85.2,82.8 98.1,82.8 99.3,81.6 99.3,76.5 98.1,75.3 86.7,75.3 85.2,76.8 83.7,76.8 83.25,76.35 83.25,74.15 82.75,74.15 82.75,76.35 82.3,76.8 79.5,76.8 78.3,75.6 72,75.6 71.7,75.9 71.7,78.3 71.1,78.9 71.1,80.4 69.3,82.2 57.6,82.2 56.4,83.4 53.1,83.4 51.9,82.2 51.9,81.9
  pour Route15 (no thermals): 20.6,81.8 20.6,75.3 21.9,74 46,74 53,81 69,81 72,78 99,78 99,81 97,83 85,83 79.5,88.5 79.5,90.9 77.1,90.9 76,92 76,99 71,99 71,92 65.9,86.9 25.7,86.9
  pour Bottom: 68.5,98.5 68.5,93.5 69,93 76,93 76,99 69,99
  pour Top (no thermals): 80.4,87.6 79.5,88.5 79.5,90.9 77.1,90.9 76,92 76,99 71,99 71,93.5 65.1,87.6

## Text on the board
Top: 1
Route2: 2
Route15: 3
Bottom: 4